# Altium PCB PCB.PcbDoc (part 1 of 3)
Units mil, origin at the board's own origin, x right, y up, seen from the top; angles counter-clockwise.
Board outline 3915 x 3280 mil, 4 copper layers (Top Layer, Top GND, Bottom GND, Bottom Layer), stack 61.581 mil thick; 92 components, 110 nets, 515 pads, 133 vias.
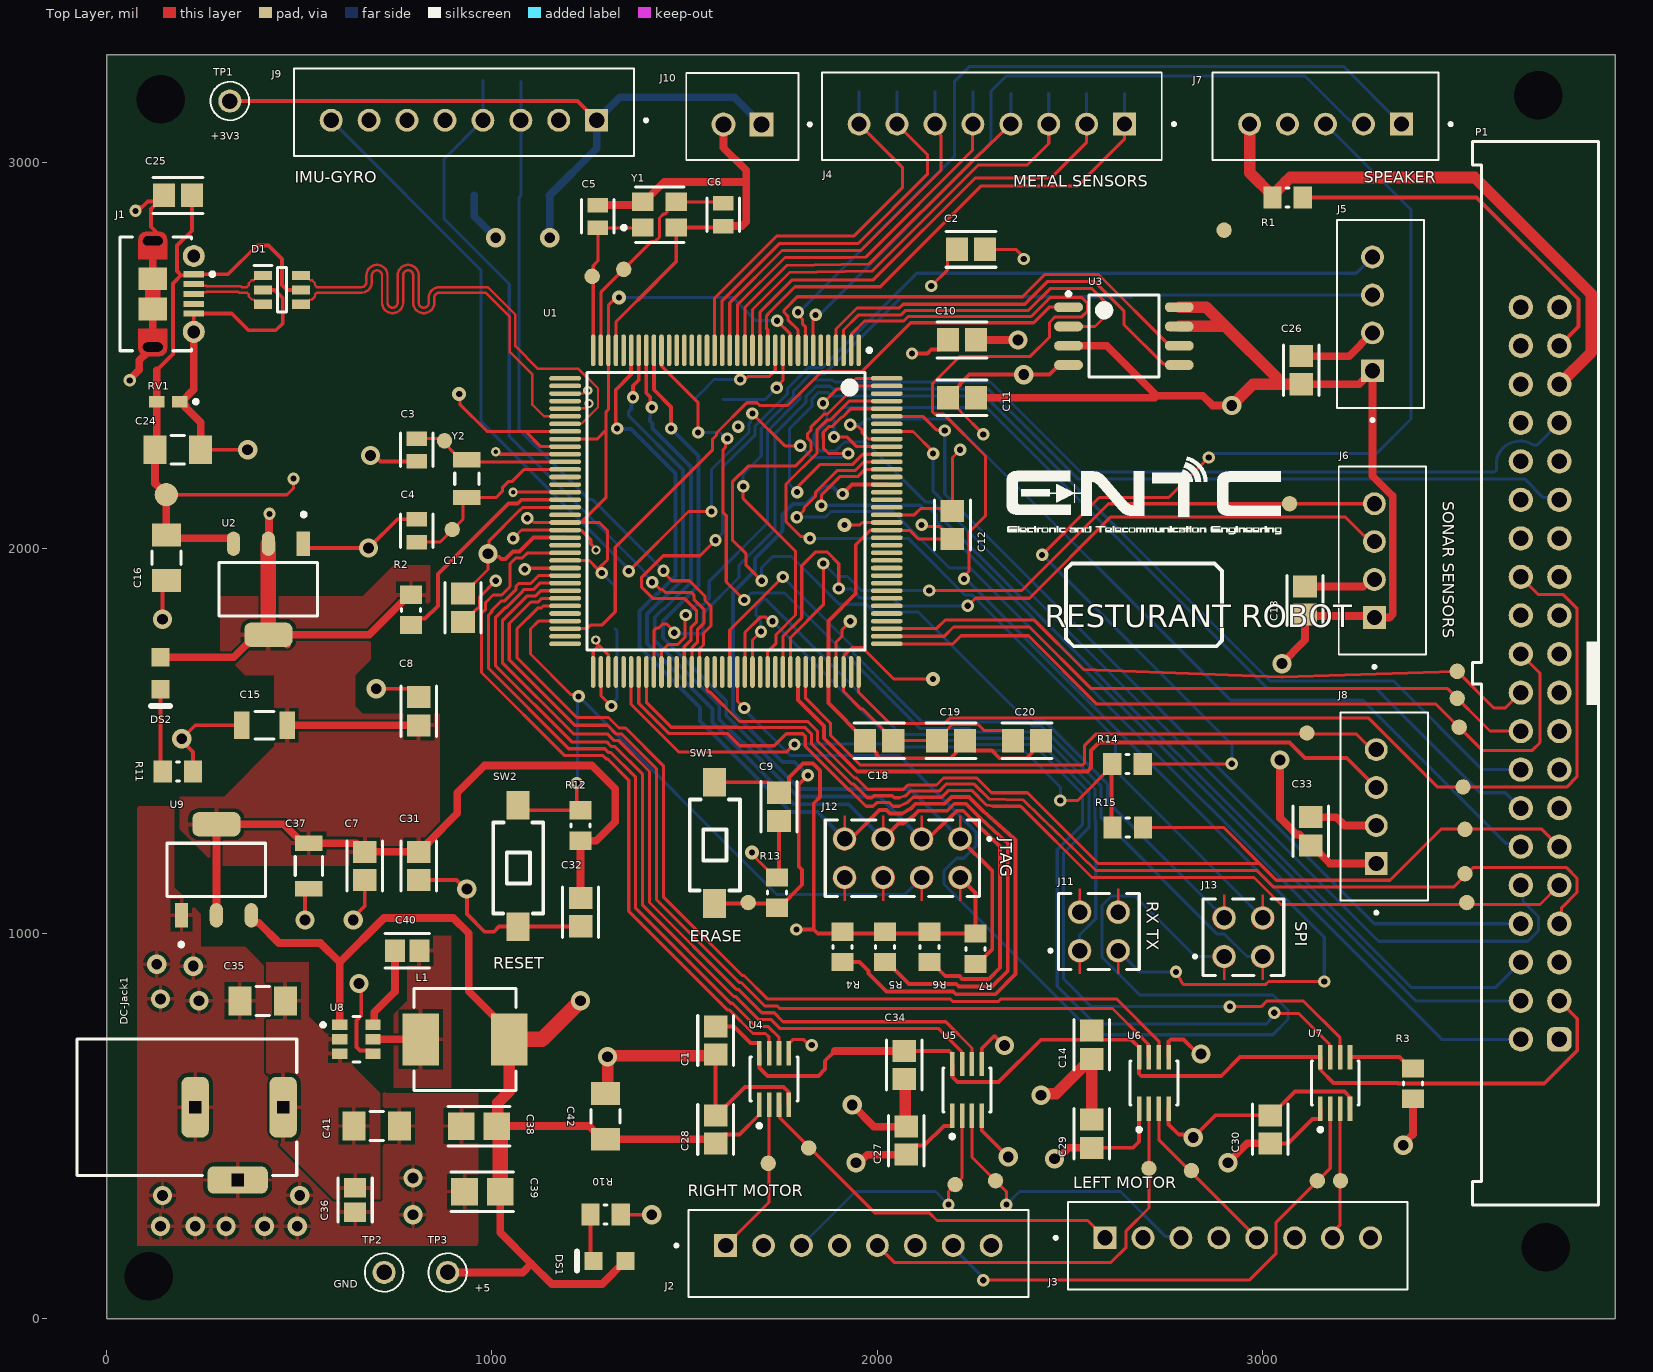
[diagram p0: Top Layer view]
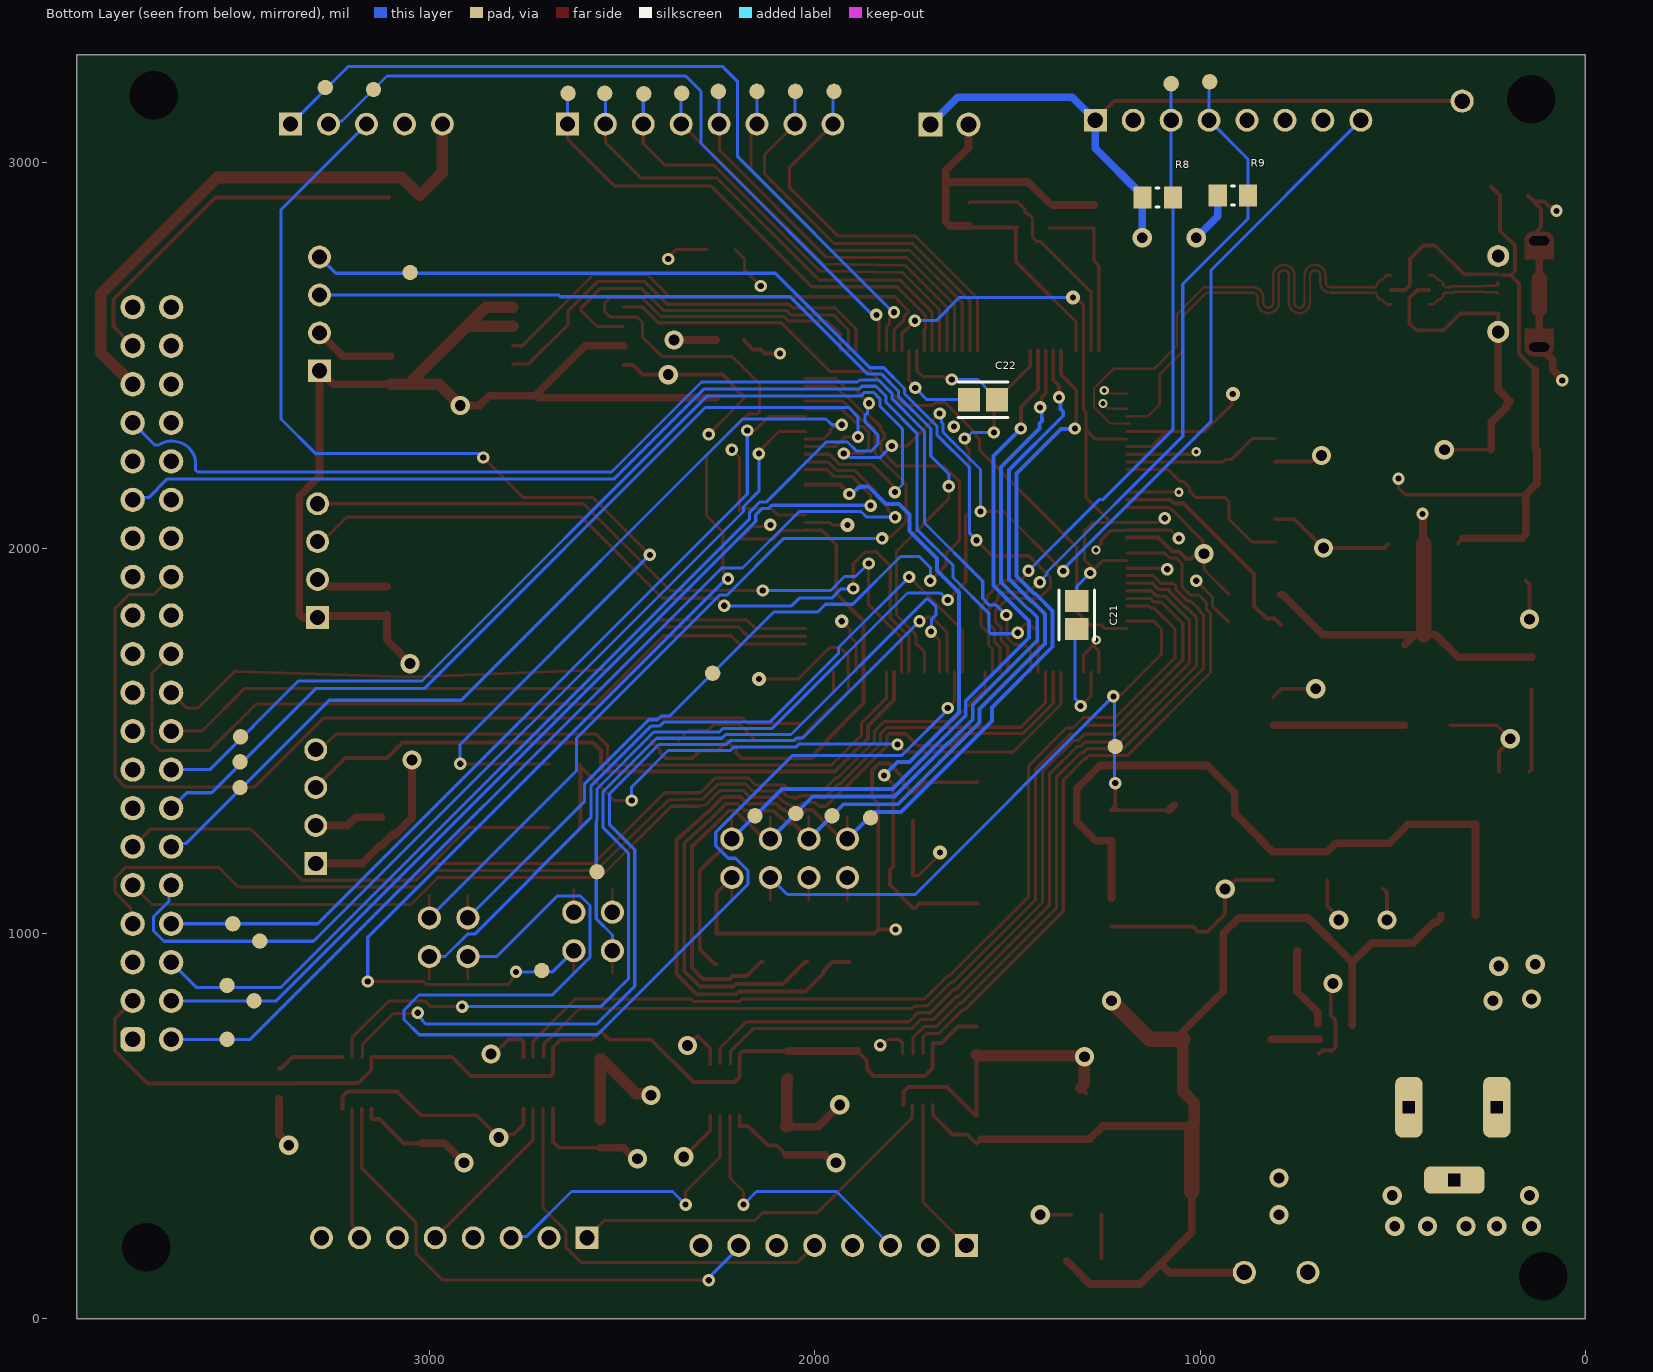
[diagram p1: Bottom Layer view, seen from below]
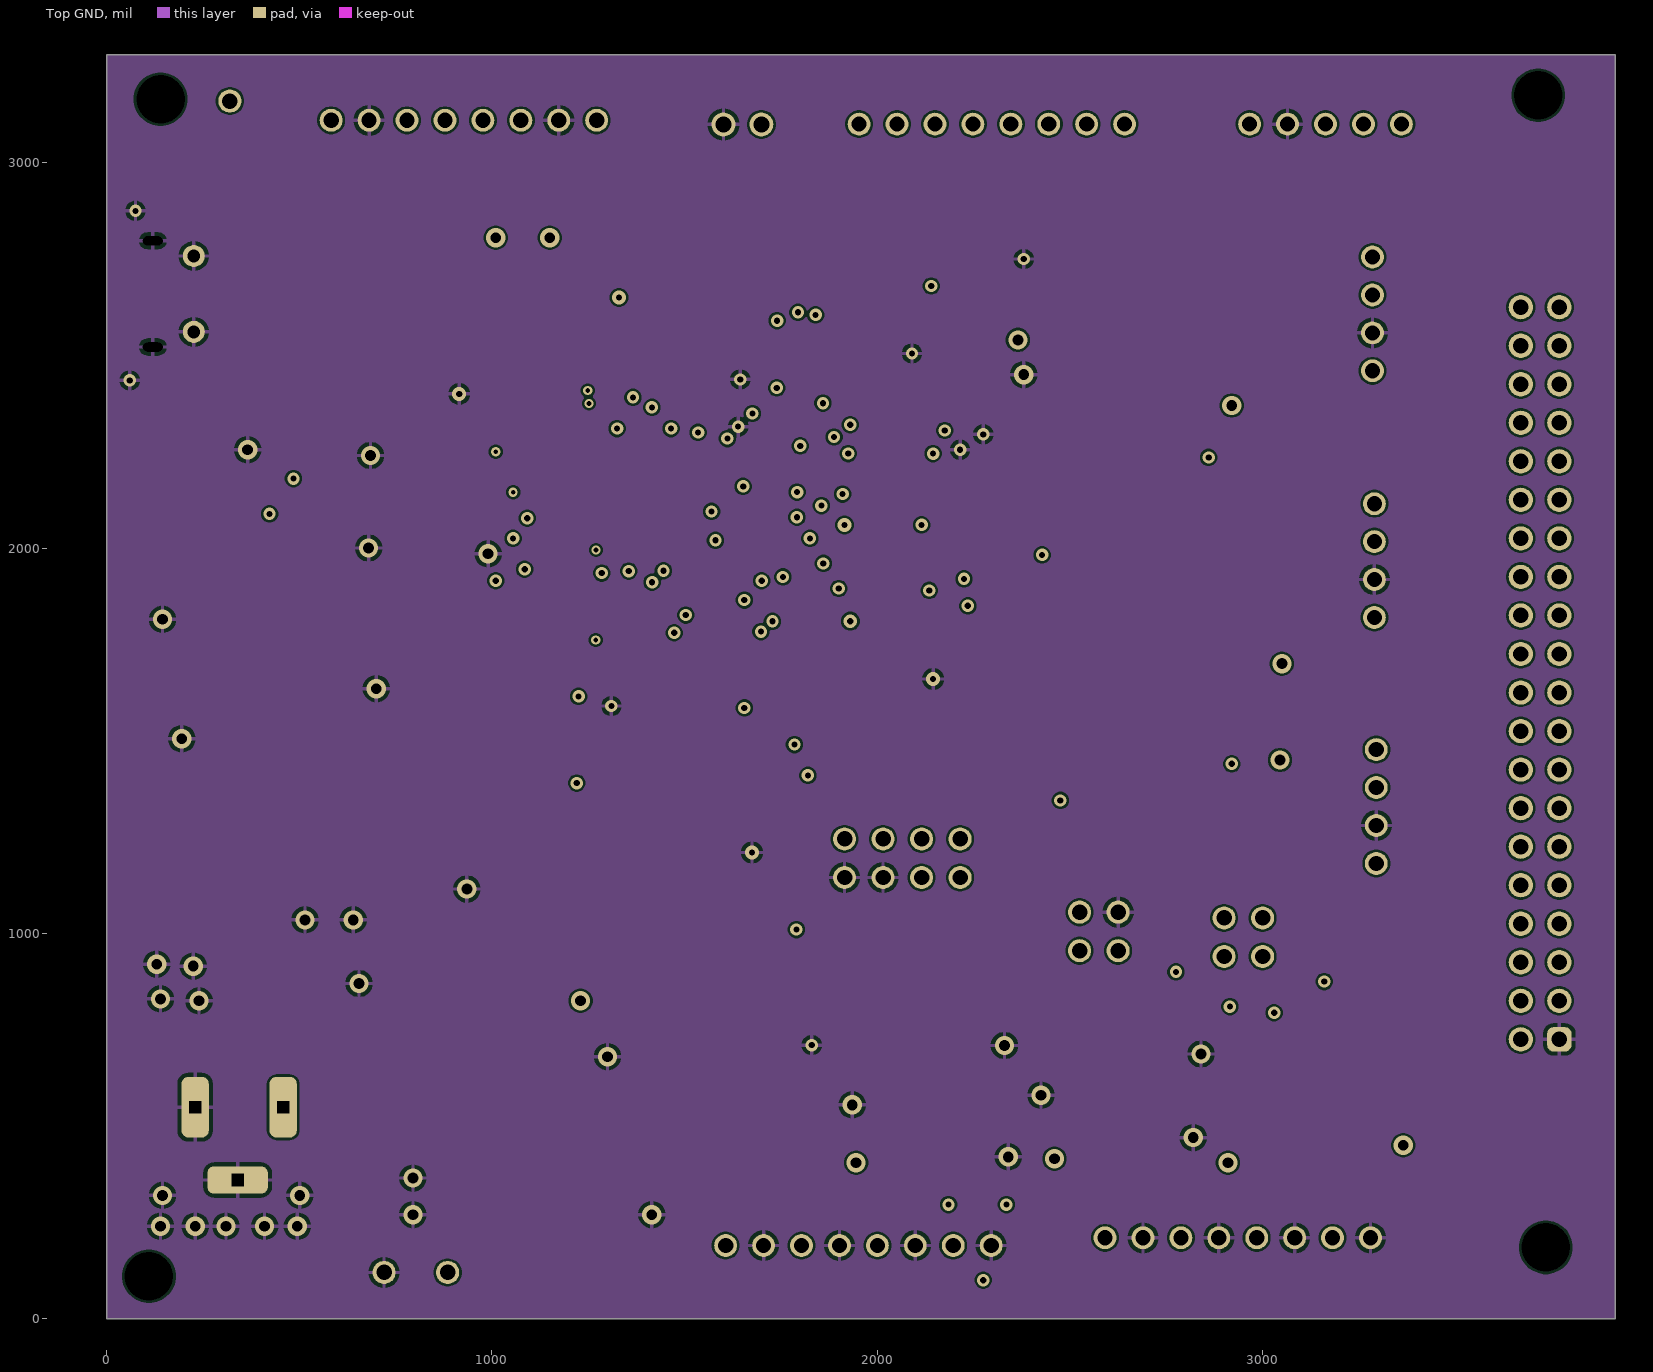
[diagram p2: Top GND]
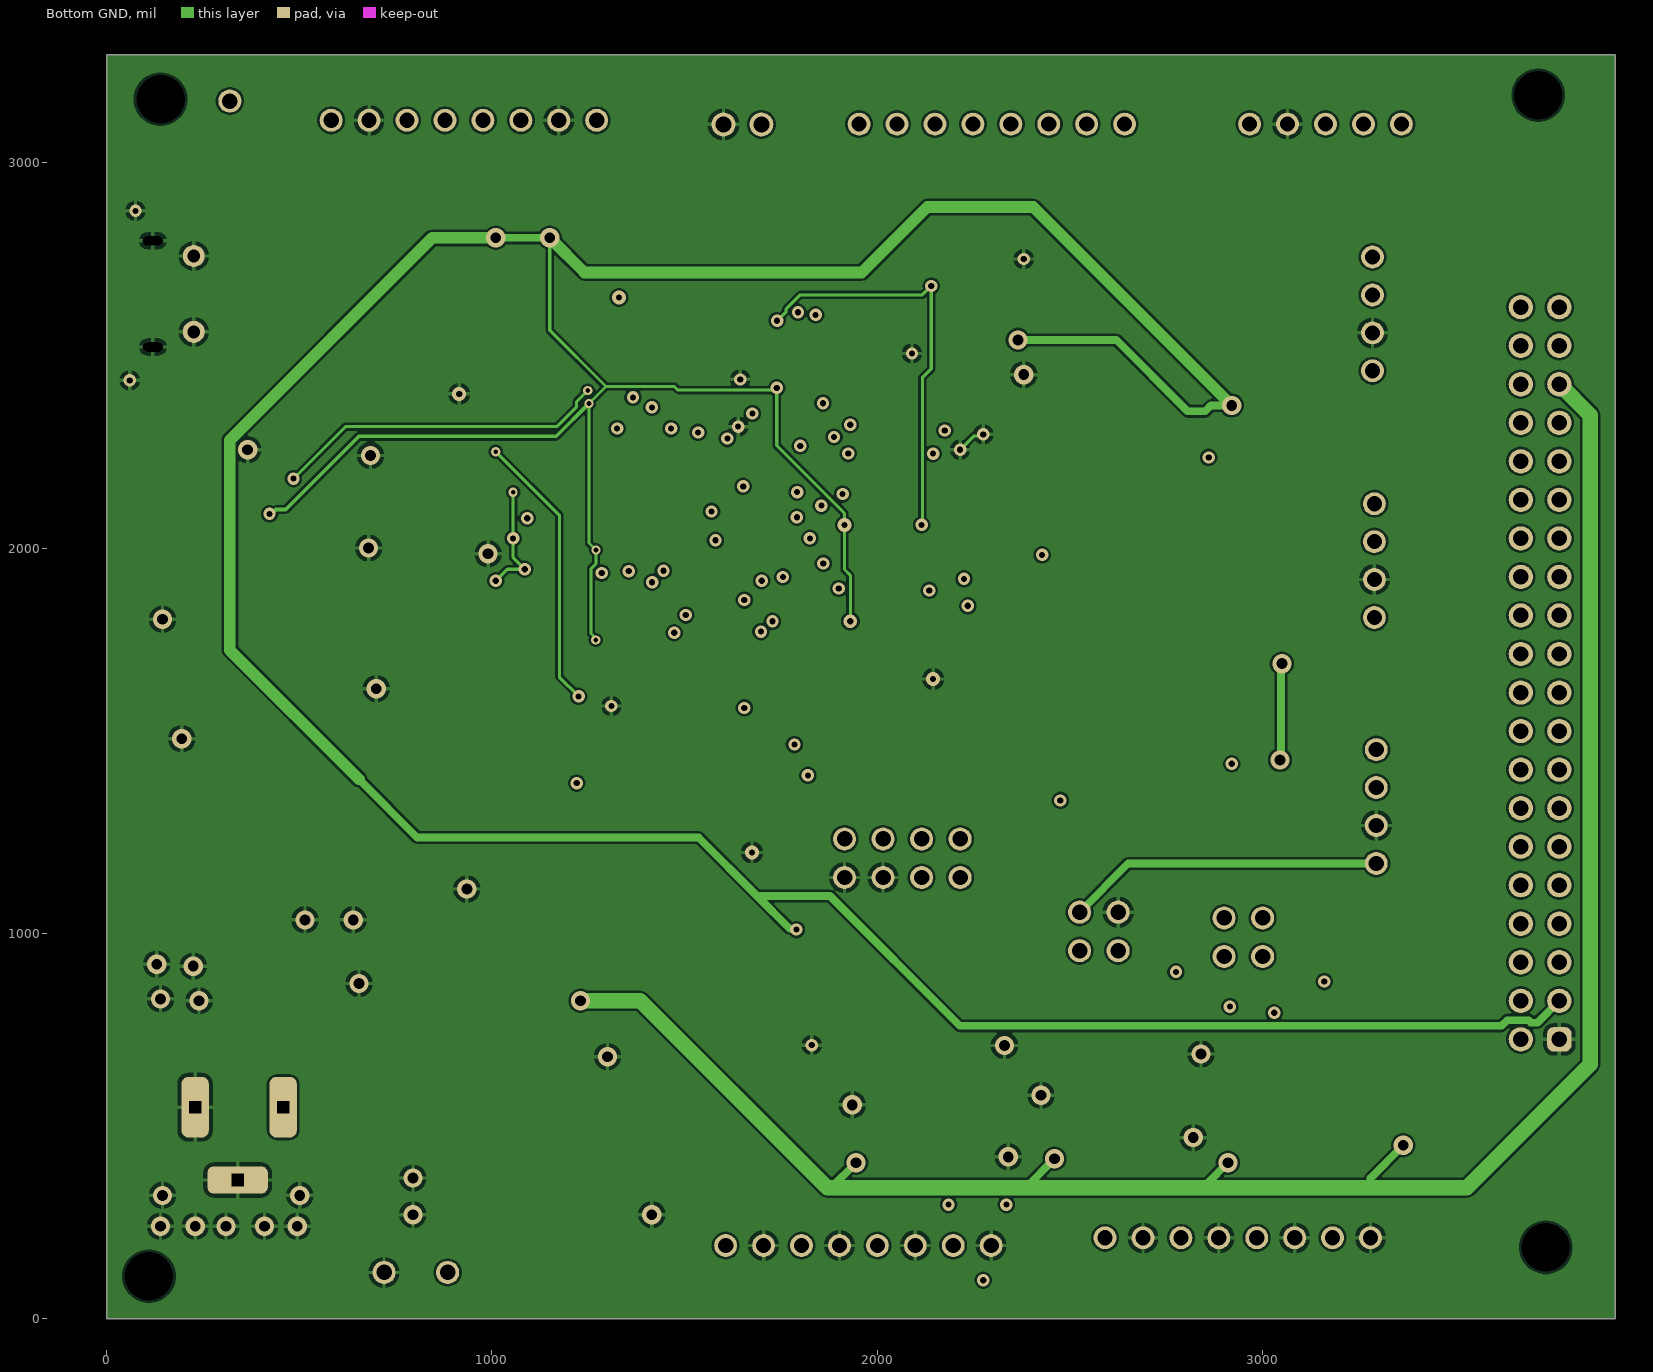
[diagram p3: Bottom GND]
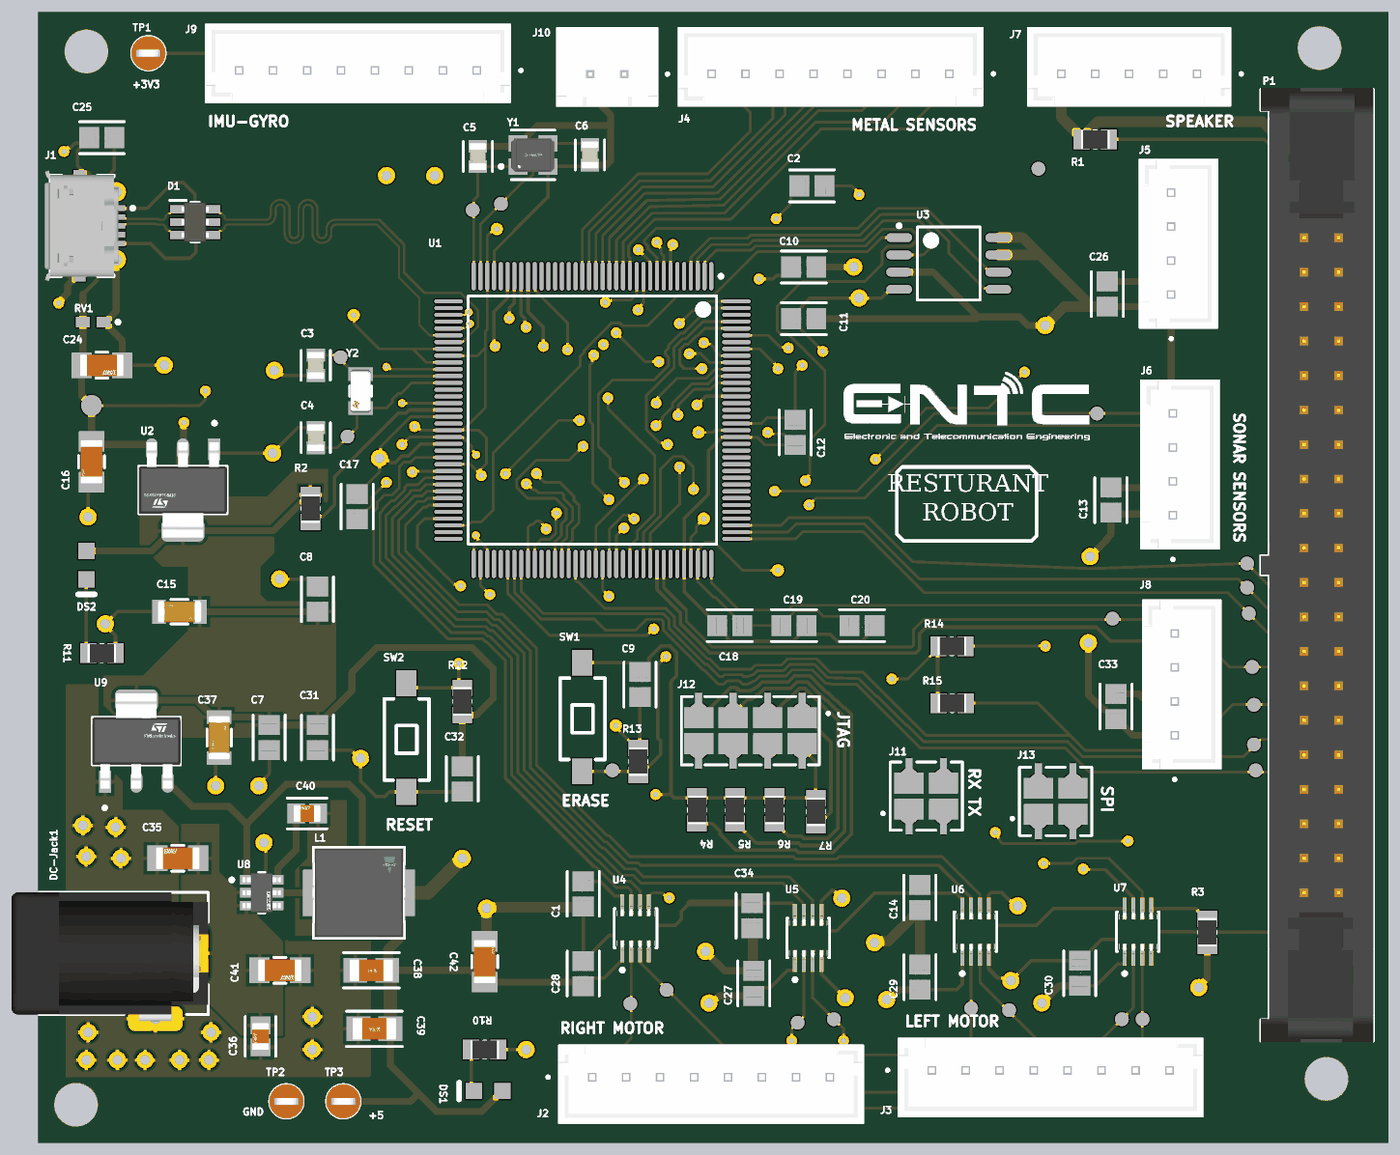
[diagram p5: 3D render of the assembled board from above, using the file's embedded part models]
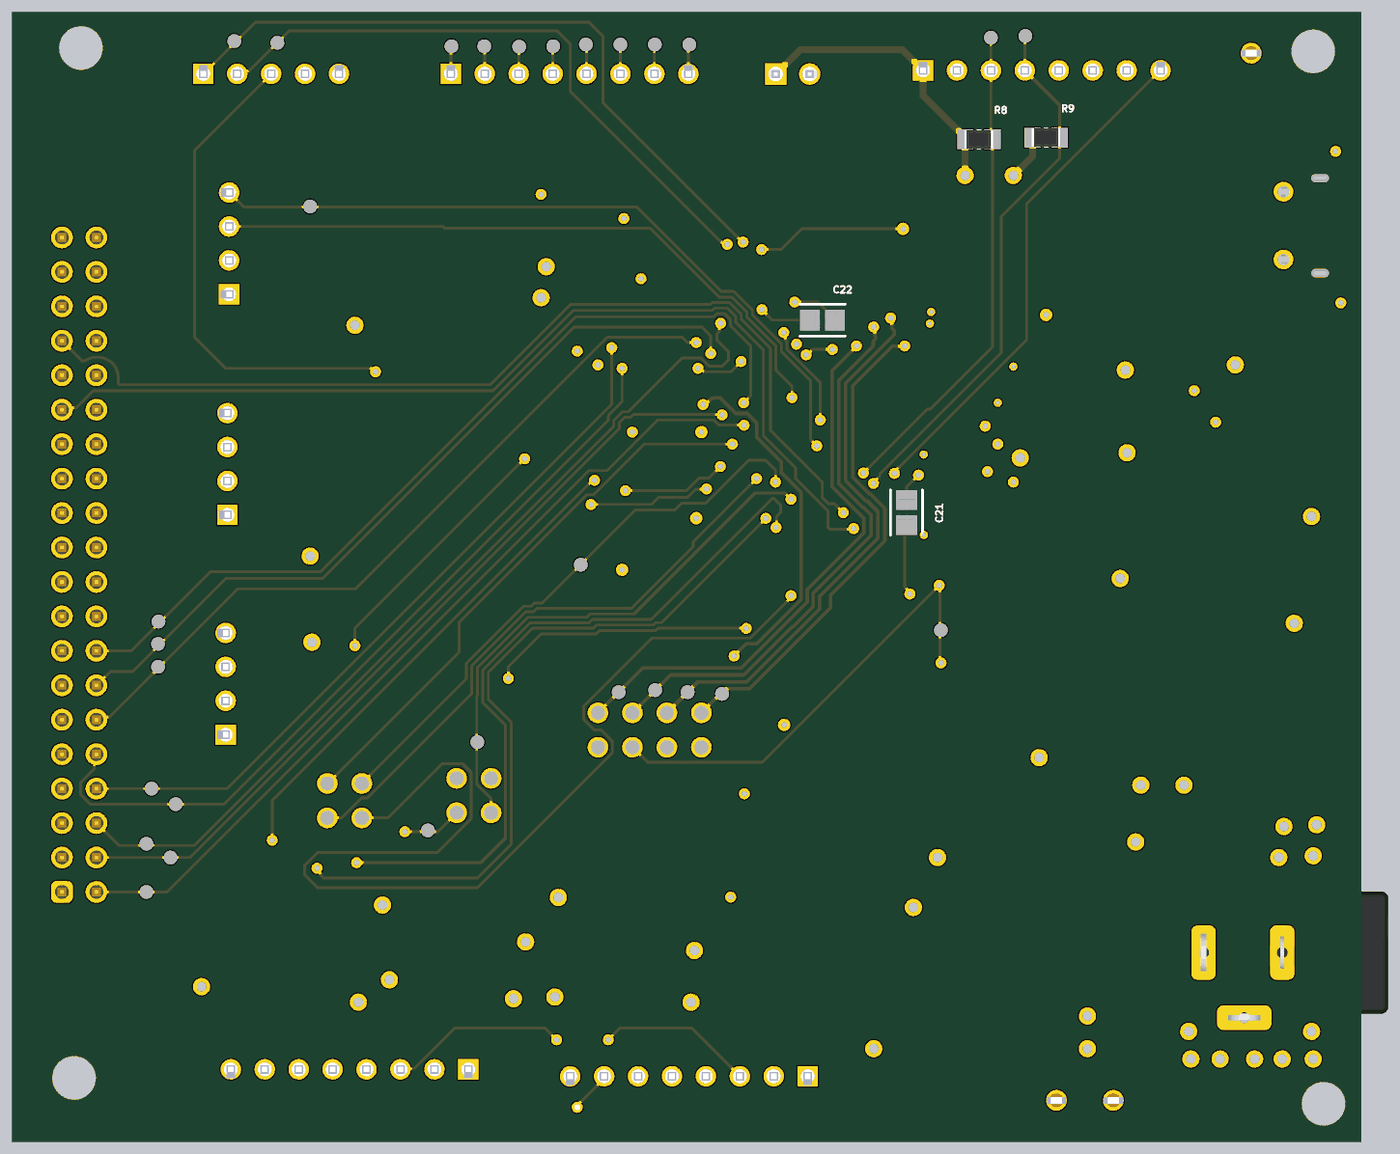
[diagram p6: 3D render of the assembled board from below, using the file's embedded part models]

## Layer stack, top to bottom
Top Solder: solder mask 0.4, Solder Resist, Dk 3.5
Top Layer: signal copper 1.378
Dielectric 2: prepreg 3.913, PP-006, Dk 4.1
Top GND: signal copper 0.598
Dielectric 1: core 49.803, FR-4, Dk 4.8
Bottom GND: signal copper 0.598
Dielectric 3: prepreg 3.913, PP-006, Dk 4.1
Bottom Layer: signal copper 1.378
Bottom Solder: solder mask 0.4, Solder Resist, Dk 3.5

## Board outline
0,0 3915,0 3915,3280 0,3280

## Design rules (kind name [scope] priority, off if disabled: settings)
Clearance Clearance_1 [(ExistsOnLayer('Top GND') Or ExistsOnLayer('Bottom GND')) vs (ExistsOnLayer('Top GND') Or ExistsOnLayer('Bottom GND'))] p1: gap=6 ignorepadtopadclearanceinfootprint=FALSE sourcerule=43 cellrowname=All cellrowtype=0 cellcolname=All cellcoltype=0 innerlayers=TRUE
Clearance Clearance_2 [(ExistsOnLayer('Top Layer') Or ExistsOnLayer('Bottom Layer')) vs (ExistsOnLayer('Top Layer') Or ExistsOnLayer('Bottom Layer'))] p2: gap=6 ignorepadtopadclearanceinfootprint=FALSE sourcerule=43 cellrowname=All cellrowtype=0 cellcolname=All cellcoltype=0 outerlayers=TRUE
Clearance [All] p3: gap=10 ignorepadtopadclearanceinfootprint=FALSE ismatrix=TRUE
DiffPairsRouting DifferentialPairsRouting_1 [InDifferentialPairClass('All Differential Pairs')] p1: maxlimit=10 minlimit=8 mostfreqgap=8 toplayer_minwidth=6.23 toplayer_maxwidth=15 toplayer_prefwidth=6.23 midlayer1_minwidth=6.23 midlayer1_maxwidth=15 midlayer1_prefwidth=6.23 midlayer2_minwidth=6.23 midlayer2_maxwidth=15 midlayer2_prefwidth=6.23 bottomlayer_minwidth=6.23 bottomlayer_maxwidth=15 bottomlayer_prefwidth=6.23 maxuncoupledlength=500
DiffPairsRouting [All] p2: maxlimit=10 minlimit=10 mostfreqgap=10 toplayer_minwidth=15 toplayer_maxwidth=15 toplayer_prefwidth=15 midlayer1_minwidth=15 midlayer1_maxwidth=15 midlayer1_prefwidth=15 midlayer2_minwidth=15 midlayer2_maxwidth=15 midlayer2_prefwidth=15 bottomlayer_minwidth=15 bottomlayer_maxwidth=15 bottomlayer_prefwidth=15 maxuncoupledlength=500
HoleSize [All] p1: absolutevalues=TRUE maxlimit=400 minlimit=1 maxpercent=80.000 minpercent=20.000
PolygonConnect [All] p1: connectstyle=Relief reliefconductorwidth=10 reliefentries=4 polygonreliefangle="90 Angle" airgapwidth=10
RoutingVias [All] p1: holewidth=16 width=32 viastyle="Through Hole" minholewidth=16 minwidth=32 maxholewidth=16 maxwidth=32
SolderMaskExpansion [All] p1: expansion=4 istentingtop=FALSE
SupplyNets "Schematic Supply Nets_5" [InNet('VBUS')] p1: voltage=0.000
SupplyNets "Schematic Supply Nets" [InNet('+VDDOUT')] p2: voltage=0.000
SupplyNets "Schematic Supply Nets_2" [InNet('+3V3')] p3: voltage=0.000
SupplyNets "Schematic Supply Nets_1" [InNet('+12')] p4: voltage=0.000
SupplyNets "Schematic Supply Nets_4" [InNet('+5')] p5: voltage=0.000
SupplyNets "Schematic Supply Nets_3" [InNet('GND')] p6: voltage=0.000
Width [All] p1 off: maxlimit=10 minlimit=10 preferedwidth=10
28 further rules are at their usual default settings.

## Classes and differential pairs
component class BUTTONS: R12 R13 SW1 SW2
component class USB: C15 C16 C24 C25 C26 D1 J1 RV1 U2 U3
component class SAM3X_MCU2: C1 C2 C3 C4 C5 C6 C7 C8 C9 C10 C12 C13 C14 C17 C18 C19 C20 C21 C22 R2 Y1 Y2
component class SAM3X-MCU: R1 R14 R15 TP1 TP2 U1
component class POWER: C35 C36 C37 C38 C39 C40 C41 C42 DC-Jack1 DS1 DS2 L1 R10 R11 U8 U9
component class MOTOR_DVR: C27 C28 C29 C30 C31 C32 C33 C34 J2 J3 R3 U4 U5 U6 U7
component class CONNECTORS: J4 J5 J6 J7 J8 J9 J10 J11 J12 J13 P1 R4 R5 R6 R7 R8 R9
differential pair D_XUSB: +XUSB_P -XUSB_N
differential pair D_USB: +USB_P -USB_N

## Components (designator, comment, footprint, x,y, rotation, side; value= is the part's Value field where it differs from the comment)
C1 "CL21B104KOANNNC" FP-CL21-IPC_A 1580.46,721.64 r270 top
C2 "CL21B104KOANNNC" FP-CL21-IPC_A 2243.55,2775 r0 top
C3 "C0805C120J5GACTU" FP-C0805C-DN-MFG 805,2254.53 r270 top locked value="12 pF"
C4 "C0805C120J5GACTU" FP-C0805C-DN-MFG 805,2045 r90 top locked value="12 pF"
C5 "C0805C120J5GACTU" FP-C0805C-DN-MFG 1275,2860.47 r90 top value="12 pF"
C6 "C0805C120J5GACTU" FP-C0805C-DN-MFG 1600,2865 r270 top locked value="12 pF"
C7 "CL21A225KOFNNNG" FP-CL21-IPC_A 670,1175 r270 top
C8 "CL21B104KOANNNC" FP-CL21-IPC_A 810,1576.45 r90 top
C9 "CL21B104KOANNNC" FP-CL21-IPC_A 1745,1328.55 r270 top locked
C10 "CL21B104KOANNNC" FP-CL21-IPC_A 2220,2540 r180 top locked
C11 "CL21B104KOANNNC" FP-CL21-IPC_A 2220,2390 r180 top locked
C12 "CL21A225KOFNNNG" FP-CL21-IPC_A 2195,2060 r90 top locked
C13 "CL21B104KOANNNC" FP-CL21-IPC_A 3110,1863.55 r90 top
C14 "CL21B104KOANNNC" FP-CL21-IPC_A 2556.67,710.97 r270 top locked
C15 "CC1206KKX7R9BB475" FP-CC1206-1_25-MFG 410,1540 r180 top value="4.7 uF"
C16 "12065C105KAT2A" FP-1206-L_3_2_0_2-W_1_6_0-IPC_A 155,1975 r270 top locked
C17 "CL21B104KOANNNC" FP-CL21-IPC_A 925,1845 r90 top
C18 "CL21B104KOANNNC" FP-CL21-IPC_A 2005,1500 r0 top
C19 "CL21B104KOANNNC" FP-CL21-IPC_A 2191.45,1500 r180 top
C20 "CL21B104KOANNNC" FP-CL21-IPC_A 2388.55,1500 r180 top locked
C21 "CL21B104KOANNNC" FP-CL21-IPC_A 1320,1826.45 r270 bottom locked
C22 "CL21B104KOANNNC" FP-CL21-IPC_A 1563.55,2385 r180 bottom locked
C24 "1206ZD106KAT2A" FP-1206-L_3_2_0_2-W_1_6_0-IPC_A 185,2255 r0 top locked
C25 "CL21B104KOANNNC" FP-CL21-IPC_A 185,2915 r180 top locked
C26 "CL21B104KOANNNC" FP-CL21-IPC_A 3100,2461.45 r90 top locked
C27 "CL21B104KOANNNC" FP-CL21-IPC_A 2075,462.06 r90 top
C28 "CL21B104KOANNNC" FP-CL21-IPC_A 1580.46,490.66 r90 top
C29 "CL21B104KOANNNC" FP-CL21-IPC_A 2556.67,480 r90 top locked
C30 "CL21B104KOANNNC" FP-CL21-IPC_A 3020,491.45 r90 top locked
C31 "CL21B104KOANNNC" FP-CL21-IPC_A 810,1175 r270 top
C32 "CL21B104KOANNNC" FP-CL21-IPC_A 1230,1055 r270 top locked
C33 "CL21B104KOANNNC" FP-CL21-IPC_A 3125,1265 r90 top locked
C34 "CL21B104KOANNNC" FP-CL21-IPC_A 2070,658.51 r270 top
C35 "1206ZD106KAT2A" FP-1206-L_3_2_0_2-W_1_6_0-IPC_A 405,825 r180 top
C36 "100nF" FP-0805-L_2_01_0_2-W_1_25-IPC_B 645,308.28 r270 top locked
C37 "CC1206KKX7R9BB475" FP-CC1206-1_25-MFG 525,1175 r270 top value="4.7 uF"
C38 "C3216X5R1E226M160AB" FP-C3216-160-0_2-IPC_B 966.3,500 r180 top
C39 "C3216X5R1E226M160AB" FP-C3216-160-0_2-IPC_B 975,330 r180 top
C40 "100nF" FP-0805-L_2_01_0_2-W_1_25-IPC_B 780,955 r180 top
C41 "1206ZD106KAT2A" FP-1206-L_3_2_0_2-W_1_6_0-IPC_A 700.91,500 r0 top
C42 "12065C105KAT2A" FP-1206-L_3_2_0_2-W_1_6_0-IPC_A 1295,525 r90 top
D1 "USBLC6-2SC6Y" SOT95P280X145-6N 455,2670 r0 top locked
DC-Jack1 "694106301002" 694106301002 208.11,548.98 r270 top
DS1 "HSMG-C170" AVAG-HSMX-C170_V 1305,150 r180 top
DS2 "HSMG-C170" AVAG-HSMX-C170_V 140,1675 r270 top locked
J1 "105017-0001" USB-MICRO-B_V 173.15,2659.37 r270 top locked
J2 "B8B-XH-A(LF)(SN)" JST_B8B-XH-A(LF)(SN) 1951.06,169.33 r180 top locked
J3 "B8B-XH-A(LF)(SN)" JST_B8B-XH-A(LF)(SN) 2935.51,189.33 r180 top locked
J4 "B8B-XH-A(LF)(SN)" JST_B8B-XH-A(LF)(SN) 2297.36,3120.67 r0 top locked
J5 "SONAR1" JST_B4B-XH-A(LF)(SN) 3305.67,2607.64 r270 top locked
J6 "SONAR2" JST_B4B-XH-A(LF)(SN) 3310.67,1967.36 r270 top locked
J7 "SPEAKER" JST_B5B-XH-A(LF)(SN) 3163.15,3120.67 r0 top locked
J8 "SONAR3" JST_B4B-XH-A(LF)(SN) 3315.67,1329.21 r270 top locked
J9 "B8B-XH-A(LF)(SN)" JST_B8B-XH-A(LF)(SN) 927.36,3130.67 r0 top locked
J10 "B2B-XH-A(LF)(SN)" JST_B2B-XH-A(LF)(SN) 1650,3120 r0 top locked
J11 "RX TX" SAMTEC_MTLW-102-XX-X-D-XXX 2575,1005 r0 top locked
J12 "JTAG" SAMTEC_MTLW-104-06-G-D-160 2065,1195 r180 top locked
J13 "SPI" SAMTEC_MTLW-102-XX-X-D-XXX 2950,990 r0 top locked value="SPI BUS"
L1 "IHLP2525BDER4R7M01" FP-IHLP-2525BD-FP_2_413x3-MFG 930,725 r0 top
P1 "61204022021" 61204022021 3720,1675 r90 top locked
R1 "RC0805JR-0710KL" RESC2013X60X35ML10T20 3065,2910 r180 top
R2 "RC0805JR-0710KL" RESC2013X60X35ML10T20 790,1839.37 r90 top locked
R3 "RC0805JR-0710KL" RESC2013X60X35ML10T20 3390,610 r90 top locked
R4 "RC0805JR-0710KL" RESC2013X60X35ML10T20 1910,965 r90 top locked
R5 "RC0805JR-0710KL" RESC2013X60X35ML10T20 2020.4,965 r90 top locked
R6 "RC0805JR-0710KL" RESC2013X60X35ML10T20 2135,965 r90 top locked
R7 "RC0805JR-0710KL" RESC2013X60X35ML10T20 2255,960 r90 top locked
R8 "RC0805JR-0710KL" RESC2013X60X35ML10T20 1110,2910 r0 bottom locked
R9 "RC0805JR-0710KL" RESC2013X60X35ML10T20 915,2915 r0 bottom locked
R10 "RC0805JR-0710KL" RESC2013X60X35ML10T20 1295,270 r0 top
R11 "RC0805JR-0710KL" RESC2013X60X35ML10T20 185,1420 r0 top
R12 "RC0805JR-0710KL" RESC2013X60X35ML10T20 1230,1280 r270 top
R13 "RC0805JR-0710KL" RESC2013X60X35ML10T20 1740,1105.63 r270 top locked
R14 "RC0805JR-0710KL" RESC2013X60X35ML10T20 2649.37,1440 r180 top locked
R15 "RC0805JR-0710KL" RESC2013X60X35ML10T20 2650,1275 r180 top locked
RV1 "CG0603MLC-05E" BOUR-CG0603-2_V 159.92,2380 r180 top locked
SW1 "SWITCH" PCBComponent_1 1580,1230 r90 top locked
SW2 "SWITCH" PCBComponent_1 1070,1170 r90 top
TP1 "5000" KEYSTONE_5000 320,3160 r0 top (schematic designator TP3)
TP2 "5000" KEYSTONE_5000 720,120 r0 top
TP3 "5000" KEYSTONE_5000 885,120 r0 top (schematic designator TP4)
U1 "ATSAM3X8EA-AU" LQFP144_M 1607.32,2095.79 r270 top locked
U2 "LDL1117S33R" FP-SOT223-0046067-IPC_C 420,1893.11 r270 top locked
U3 "W25Q128FVSIG" WINB-SOIC-8_M 2640,2550 r0 top
U4 "SN74LVC2T45DCTR" FP-DCT0008A-MFG 1732.2,621.93 r90 top
U5 "SN74LVC2T45DCTR" FP-DCT0008A-MFG 2232.8,593.99 r90 top
U6 "SN74LVC2T45DCTR" FP-DCT0008A-MFG 2717.8,611.93 r90 top locked
U7 "SN74LVC2T45DCTR" FP-DCT0008A-MFG 3188.39,611.93 r90 top locked
U8 "AP63205WU-7" FP-TSOT26-MFG 648.29,725 r0 top
U9 "LDL1117S33R" FP-SOT223-0046067-IPC_C 285,1165 r90 top
Y1 "12MHZ" FP-ABM8G-MFG 1435,2865 r0 top locked
Y2 "32.768KHZ" FP-NX3215SA-MFG 935,2180 r270 top locked

## Footprints (in the part's own frame and the unit in brackets; to place one, negate y for a bottom-side part, rotate by r counter-clockwise, add the part's x,y. Pads: shape width x height; smd on the part's side, far side on the other; paste and mask are expansions set on the pad)
61204022021 [mm] "40 pins, straight, short lever, gold plating"
  rrect50% 1.6x1.6 hole 1.02: 1(-24.13,-1.27)
  round 1.6 hole 1.02: 2(-24.13,1.27) 3(-21.59,-1.27) 4(-21.59,1.27) 5(-19.05,-1.27) 6(-19.05,1.27) 7(-16.51,-1.27) 8(-16.51,1.27) 9(-13.97,-1.27) 10(-13.97,1.27) 11(-11.43,-1.27) 12(-11.43,1.27) 13(-8.89,-1.27) 14(-8.89,1.27) 15(-6.35,-1.27) 16(-6.35,1.27) 17(-3.81,-1.27) 18(-3.81,1.27) 19(-1.27,-1.27) 20(-1.27,1.27) 21(1.27,-1.27) 22(1.27,1.27) 23(3.81,-1.27) 24(3.81,1.27) 25(6.35,-1.27) 26(6.35,1.27) 27(8.89,-1.27) 28(8.89,1.27) 29(11.43,-1.27) 30(11.43,1.27) 31(13.97,-1.27) 32(13.97,1.27) 33(16.51,-1.27) 34(16.51,1.27) 35(19.05,-1.27) 36(19.05,1.27) 37(21.59,-1.27) 38(21.59,1.27) 39(24.13,-1.27) 40(24.13,1.27)
  silkscreen extent -35.05,-3.85 35.05,4.45, body extent -35.15,-3.85 35.15,4.45, height 24.55
694106301002 [mm] "DC Power Jack Right Angled(6.4)"
  rrect50% 4x1.8 hole 0.8 square: 1(0,6.35) 2(0,0.55)
  rrect50% 1.8x4 hole 0.8 square: 3(4.8,3.35)
  silkscreen extent -4.5,-7.25 4.5,7.25, body extent -4.5,-7.25 5,7.25, height 10.75
AVAG-HSMX-C170_V [mm] "SMD, 2-Leads, Body 2x1.25mm, Height 0.8mm"
  rect 1.2x1.2 smd: 1(-1.05,0) 2(1.05,0)
  silkscreen extent 2.15,-0.63 2.15,0.63, body extent -1,-0.63 1,0.63, height 0.8
BOUR-CG0603-2_V [mm] "SMD, 2-Leads, Body 1.6x0.8mm, Pitch 1.52mm"
  rect 1.02x0.76 smd: 1(-0.76,0) 2(0.76,0)
  silkscreen extent -1.94,-0.12 -1.7,0.12, body extent -0.8,-0.4 0.8,0.4, height 0.55
FP-0805-L_2_01_0_2-W_1_25-IPC_B [mil]
  rect 51.36x57.33 smd paste+0 mask+0: 1(-31.72,0) 2(31.72,0)
  silkscreen extent -57,-44 57,44, body extent -67,-39 67,39, height 10
FP-1206-L_3_2_0_2-W_1_6_0-IPC_A [mil]
  rect 59.24x75.05 smd paste+0 mask+0: 1(-59.09,0) 2(59.09,0)
  silkscreen extent -18,-38 18,38, body extent -108,-57 108,57, height 10
FP-ABM8G-MFG [mm]
  rect 1.4x1.2 smd paste+0 mask+0: 1(-1.1,-0.85) 2(1.1,-0.85) 3(1.1,0.85) 4(-1.1,0.85)
  silkscreen extent -2.47,-1.83 1.6,1.83, body extent -1.9,-1.55 1.9,1.55, height 0.25
FP-C0805C-DN-MFG [mm]
  rect 0.95x1.35 smd paste+0 mask+0: 1(-0.75,0) 2(0.75,0)
  silkscreen extent -1.1,-1.07 1.1,1.07, body extent -1.4,-0.85 1.4,0.85, height 0.25
FP-C3216-160-0_2-IPC_B [mil]
  rect 69.05x71.11 smd paste+0 mask+0: 1(-46.3,0) 2(46.3,0)
  silkscreen extent -81,-51 81,51, body extent -91,-45 91,45, height 10
FP-CC1206-1_25-MFG [mm]
  rect 1x1.8 smd paste+0 mask+0: 1(-1.5,0) 2(1.5,0)
  silkscreen extent -0.63,-0.9 0.63,0.9, body extent -2.2,-1.25 2.2,1.25, height 0.25
FP-CL21-IPC_A [mil]
  rect 57.27x61.27 smd paste+0 mask+0: 1(-36.45,0) 2(36.45,0)
  silkscreen extent -65,-46 65,46, body extent -85,-50 85,50, height 10
FP-DCT0008A-MFG [mm]
  rect 1.6x0.3 smd paste-1000 mask+0: 1(-1.7,0.975) 2(-1.7,0.325) 3(-1.7,-0.325) 4(-1.7,-0.975) 5(1.7,-0.975) 6(1.7,-0.325) 7(1.7,0.325) 8(1.7,0.975)
  silkscreen extent -3.2,-1.58 1.45,1.58, body extent -2.6,-1.68 2.6,1.68, height 0.25
FP-IHLP-2525BD-FP_2_413x3-MFG [mil]
  rect 95x135 smd paste+0 mask+0: 1(-115,0) 2(115,0)
  silkscreen extent -132,-132 132,132, body extent -166,-136 166,136, height 10
FP-NX3215SA-MFG [mm]
  rect 1x1.8 smd paste+0 mask+0: 1(-1.25,0) 2(1.25,0)
  silkscreen extent -0.38,-0.8 0.38,0.8, body extent -1.85,-1 1.85,1, height 0.25
FP-SOT223-0046067-IPC_C [mm]
  rect 1.604x0.88 smd paste+0 mask+0: 1(-3,2.3)
  rrect100% 1.604x0.88 smd paste+0 mask+0: 2(-3,0) 3(-3,-2.3)
  rrect55% 1.604x3.18 smd paste+0 mask+0: 4(3,0)
  silkscreen extent -5.05,-3.25 1.75,3.25, body extent -3.9,-3.35 3.9,3.35, height 0.25
FP-TSOT26-MFG [mm]
  rect 1x0.7 smd paste+0 mask+0: 1(-1.099,0.95) 2(-1.099,0) 3(-1.099,-0.95) 4(1.099,-0.95) 5(1.099,0) 6(1.099,0.95)
  silkscreen extent -2.32,-1.5 0.22,1.5, body extent -1.7,-1.6 1.7,1.6, height 0.25
JST_B2B-XH-A(LF)(SN) [mm]
  rect 1.575x1.575 / inner round 1.575 / far side rect 1.575x1.575 hole 1.05: 1(1.25,-0.525)
  round 1.575 hole 1.05: 2(-1.25,-0.525)
  silkscreen extent -3.7,-2.88 4.54,2.88, body extent -3.7,-2.88 3.7,2.88, height 7
JST_B4B-XH-A(LF)(SN) [mm]
  rect 1.508x1.508 / inner round 1.508 / far side rect 1.508x1.508 hole 1: 1(3.75,-0.525)
  round 1.508 hole 1: 2(1.25,-0.525) 3(-1.25,-0.525) 4(-3.75,-0.525)
  silkscreen extent -6.2,-2.88 7.1,2.88, body extent -6.2,-2.88 6.2,2.88, height 7
JST_B5B-XH-A(LF)(SN) [mm]
  rect 1.508x1.508 / inner round 1.508 / far side rect 1.508x1.508 hole 1: 1(5,-0.525)
  round 1.508 hole 1: 2(2.5,-0.525) 3(0,-0.525) 4(-2.5,-0.525) 5(-5,-0.525)
  silkscreen extent -7.45,-2.88 8.35,2.88, body extent -7.45,-2.88 7.45,2.88, height 7
JST_B8B-XH-A(LF)(SN) [mm]
  rect 1.508x1.508 / inner round 1.508 / far side rect 1.508x1.508 hole 1: 1(8.75,-0.525)
  round 1.508 hole 1: 2(6.25,-0.525) 3(3.75,-0.525) 4(1.25,-0.525) 5(-1.25,-0.525) 6(-3.75,-0.525) 7(-6.25,-0.525) 8(-8.75,-0.525)
  silkscreen extent -11.2,-2.88 12.1,2.88, body extent -11.2,-2.88 11.2,2.88, height 7
KEYSTONE_5000 [mm]
  round 1.53 hole 1.02: TP(0,0)
  silkscreen extent -1.27,-1.27 1.27,1.27, body extent -1.27,-1.27 1.27,1.27, height 4.57
LQFP144_M [mm] "Thin QFP, 144-Leads, Body 20x20mm, Pitch 0.5mm, IPC Low Density"
  oval 2.1x0.3 smd: 1(-10.6,8.75) 2(-10.6,8.25) 3(-10.6,7.75) 4(-10.6,7.25) 5(-10.6,6.75) 6(-10.6,6.25) 7(-10.6,5.75) 8(-10.6,5.25) 9(-10.6,4.75) 10(-10.6,4.25) 11(-10.6,3.75) 12(-10.6,3.25) 13(-10.6,2.75) 14(-10.6,2.25) 15(-10.6,1.75) 16(-10.6,1.25) 17(-10.6,0.75) 18(-10.6,0.25) 19(-10.6,-0.25) 20(-10.6,-0.75) 21(-10.6,-1.25) 22(-10.6,-1.75) 23(-10.6,-2.25) 24(-10.6,-2.75) 25(-10.6,-3.25) 26(-10.6,-3.75) 27(-10.6,-4.25) 28(-10.6,-4.75) 29(-10.6,-5.25) 30(-10.6,-5.75) 31(-10.6,-6.25) 32(-10.6,-6.75) 33(-10.6,-7.25) 34(-10.6,-7.75) 35(-10.6,-8.25) 36(-10.6,-8.75) 73(10.6,-8.75) 74(10.6,-8.25) 75(10.6,-7.75) 76(10.6,-7.25) 77(10.6,-6.75) 78(10.6,-6.25) 79(10.6,-5.75) 80(10.6,-5.25) 81(10.6,-4.75) 82(10.6,-4.25) 83(10.6,-3.75) 84(10.6,-3.25) 85(10.6,-2.75) 86(10.6,-2.25) 87(10.6,-1.75) 88(10.6,-1.25) 89(10.6,-0.75) 90(10.6,-0.25) 91(10.6,0.25) 92(10.6,0.75) 93(10.6,1.25) 94(10.6,1.75) 95(10.6,2.25) 96(10.6,2.75) 97(10.6,3.25) 98(10.6,3.75) 99(10.6,4.25) 100(10.6,4.75) 101(10.6,5.25) 102(10.6,5.75) 103(10.6,6.25) 104(10.6,6.75) 105(10.6,7.25) 106(10.6,7.75) 107(10.6,8.25) 108(10.6,8.75)
  oval 0.3x2.1 smd: 37(-8.75,-10.6) 38(-8.25,-10.6) 39(-7.75,-10.6) 40(-7.25,-10.6) 41(-6.75,-10.6) 42(-6.25,-10.6) 43(-5.75,-10.6) 44(-5.25,-10.6) 45(-4.75,-10.6) 46(-4.25,-10.6) 47(-3.75,-10.6) 48(-3.25,-10.6) 49(-2.75,-10.6) 50(-2.25,-10.6) 51(-1.75,-10.6) 52(-1.25,-10.6) 53(-0.75,-10.6) 54(-0.25,-10.6) 55(0.25,-10.6) 56(0.75,-10.6) 57(1.25,-10.6) 58(1.75,-10.6) 59(2.25,-10.6) 60(2.75,-10.6) 61(3.25,-10.6) 62(3.75,-10.6) 63(4.25,-10.6) 64(4.75,-10.6) 65(5.25,-10.6) 66(5.75,-10.6) 67(6.25,-10.6) 68(6.75,-10.6) 69(7.25,-10.6) 70(7.75,-10.6) 71(8.25,-10.6) 72(8.75,-10.6) 109(8.75,10.6) 110(8.25,10.6) 111(7.75,10.6) 112(7.25,10.6) 113(6.75,10.6) 114(6.25,10.6) 115(5.75,10.6) 116(5.25,10.6) 117(4.75,10.6) 118(4.25,10.6) 119(3.75,10.6) 120(3.25,10.6) 121(2.75,10.6) 122(2.25,10.6) 123(1.75,10.6) 124(1.25,10.6) 125(0.75,10.6) 126(0.25,10.6) 127(-0.25,10.6) 128(-0.75,10.6) 129(-1.25,10.6) 130(-1.75,10.6) 131(-2.25,10.6) 132(-2.75,10.6) 133(-3.25,10.6) 134(-3.75,10.6) 135(-4.25,10.6) 136(-4.75,10.6) 137(-5.25,10.6) 138(-5.75,10.6) 139(-6.25,10.6) 140(-6.75,10.6) 141(-7.25,10.6) 142(-7.75,10.6) 143(-8.25,10.6) 144(-8.75,10.6)
  silkscreen extent -10.72,-9.15 9.15,9.58, body extent -10,-10 10,10, height 1.6
PCBComponent_1 [mm]
  rect 1.9x1.5 smd: 1(-3.876,0.059) 2(4.124,0.059)
  silkscreen extent -3.01,-1.61 2.99,1.69, body extent -3.87,-1.8 4.13,1.8, height 2.5
RESC2013X60X35ML10T20 [mm] "Chip Resistor, 2-Leads, Body 2.1x1.35mm, IPC Low Density"
  rect 1.2x1.45 smd: 1(-1,0) 2(1,0)
  silkscreen extent -0.1,-0.63 0.1,0.63, body extent -1.05,-0.68 1.05,0.67, height 0.6
SAMTEC_MTLW-102-XX-X-D-XXX [mm]
  round 1.52 hole 1.02: 01(-1.27,-1.27) 02(-1.27,1.27) 03(1.27,-1.27) 04(1.27,1.27)
  Top Layer region: 1.335,2.03 1.364,2.027 1.398,2.022 1.433,2.016 1.467,2.008 1.5,1.998 1.533,1.987 1.566,1.975 1.598,1.961 1.629,1.945 1.66,1.928 1.69,1.91 1.719,1.89 1.746,1.869 1.773,1.847 1.799,1.823 1.824,1.799 1.848,1.773 1.87,1.746 1.891,1.718 1.911,1.69 1.93,1.66 1.947,1.63 1.963,1.598 1.977,1.566 1.99,1.534 2.001,1.501 2.011,1.467 2.019,1.433 2.026,1.399 2.03,1.37 2.03,1.27 2.029,1.23 2.026,1.191 2.021,1.151 2.013,1.112 2.004,1.073 1.993,1.035 1.98,0.998 1.964,0.961 1.947,0.925 1.928,0.89 1.907,0.856 1.885,0.823 1.861,0.792 1.835,0.761 1.807,0.733 1.779,0.705 1.748,0.679 1.717,0.655 1.684,0.633 1.65,0.612 1.615,0.593 1.579,0.576 1.542,0.56 1.505,0.547 1.467,0.536 1.428,0.527 1.389,0.519 1.349,0.514 1.31,0.511 1.27,0.51 1.23,0.511 1.191,0.514 1.151,0.519 1.112,0.527 1.073,0.536 1.035,0.547 0.998,0.56 0.961,0.576 0.925,0.593 0.89,0.612 0.856,0.633 0.823,0.655 0.792,0.679 0.761,0.705 0.733,0.733 0.705,0.761 0.679,0.792 0.655,0.823 0.633,0.856 0.612,0.89 0.593,0.925 0.576,0.961 0.56,0.998 0.547,1.035 0.536,1.073 0.527,1.112 0.519,1.151 0.514,1.191 0.511,1.23 0.51,1.27 0.51,1.37 0.514,1.399 0.521,1.433 0.529,1.467 0.539,1.501 0.55,1.534 0.563,1.566 0.577,1.598 0.593,1.63 0.61,1.66 0.629,1.69 0.649,1.718 0.67,1.746 0.692,1.773 0.716,1.799 0.741,1.823 0.767,1.847 0.794,1.869 0.821,1.89 0.85,1.91 0.88,1.928 0.911,1.945 0.942,1.961 0.974,1.975 1.007,1.987 1.04,1.998 1.073,2.008 1.107,2.016 1.142,2.022 1.176,2.027 1.205,2.03 1.205,2.8 1.335,2.8
  Top Layer region: 1.349,-0.514 1.428,-0.527 1.505,-0.547 1.579,-0.576 1.65,-0.612 1.717,-0.655 1.779,-0.705 1.835,-0.761 1.885,-0.823 1.928,-0.89 1.964,-0.961 1.993,-1.035 2.013,-1.112 2.026,-1.191 2.03,-1.27 2.029,-1.308 2.026,-1.346 2.022,-1.383 2.015,-1.421 2.007,-1.457 1.997,-1.494 1.985,-1.529 1.971,-1.564 1.956,-1.599 1.939,-1.633 1.92,-1.665 1.9,-1.697 1.878,-1.728 1.855,-1.757 1.83,-1.786 1.804,-1.813 1.776,-1.839 1.747,-1.863 1.718,-1.886 1.687,-1.908 1.655,-1.928 1.622,-1.946 1.588,-1.962 1.553,-1.977 1.518,-1.991 1.482,-2.002 1.446,-2.012 1.409,-2.02 1.372,-2.026 1.335,-2.03 1.335,-2.8 1.205,-2.8 1.205,-2.03 1.168,-2.026 1.131,-2.02 1.094,-2.012 1.058,-2.002 1.022,-1.991 0.987,-1.977 0.952,-1.962 0.918,-1.946 0.885,-1.928 0.853,-1.908 0.822,-1.886 0.793,-1.863 0.764,-1.839 0.736,-1.813 0.71,-1.786 0.685,-1.757 0.662,-1.728 0.64,-1.697 0.62,-1.665 0.601,-1.633 0.584,-1.599 0.569,-1.564 0.555,-1.529 0.543,-1.494 0.533,-1.457 0.525,-1.421 0.518,-1.383 0.514,-1.346 0.511,-1.308 0.51,-1.27 0.514,-1.191 0.527,-1.112 0.547,-1.035 0.576,-0.961 0.612,-0.89 0.655,-0.823 0.705,-0.761 0.761,-0.705 0.823,-0.655 0.89,-0.612 0.961,-0.576 1.035,-0.547 1.112,-0.527 1.191,-0.514 1.27,-0.51
  Top Layer region: -1.205,2.03 -1.176,2.027 -1.142,2.022 -1.107,2.016 -1.073,2.008 -1.04,1.998 -1.007,1.987 -0.974,1.975 -0.942,1.961 -0.911,1.945 -0.88,1.928 -0.85,1.91 -0.821,1.89 -0.794,1.869 -0.767,1.847 -0.741,1.823 -0.716,1.799 -0.692,1.773 -0.67,1.746 -0.649,1.718 -0.629,1.69 -0.61,1.66 -0.593,1.63 -0.577,1.598 -0.563,1.566 -0.55,1.534 -0.539,1.501 -0.529,1.467 -0.521,1.433 -0.514,1.399 -0.51,1.37 -0.51,1.27 -0.511,1.23 -0.514,1.191 -0.519,1.151 -0.527,1.112 -0.536,1.073 -0.547,1.035 -0.56,0.998 -0.576,0.961 -0.593,0.925 -0.612,0.89 -0.633,0.856 -0.655,0.823 -0.679,0.792 -0.705,0.761 -0.733,0.733 -0.761,0.705 -0.792,0.679 -0.823,0.655 -0.856,0.633 -0.89,0.612 -0.925,0.593 -0.961,0.576 -0.998,0.56 -1.035,0.547 -1.073,0.536 -1.112,0.527 -1.151,0.519 -1.191,0.514 -1.23,0.511 -1.27,0.51 -1.31,0.511 -1.349,0.514 -1.389,0.519 -1.428,0.527 -1.467,0.536 -1.505,0.547 -1.542,0.56 -1.579,0.576 -1.615,0.593 -1.65,0.612 -1.684,0.633 -1.717,0.655 -1.748,0.679 -1.779,0.705 -1.807,0.733 -1.835,0.761 -1.861,0.792 -1.885,0.823 -1.907,0.856 -1.928,0.89 -1.947,0.925 -1.964,0.961 -1.98,0.998 -1.993,1.035 -2.004,1.073 -2.013,1.112 -2.021,1.151 -2.026,1.191 -2.029,1.23 -2.03,1.27 -2.03,1.37 -2.026,1.399 -2.019,1.433 -2.011,1.467 -2.001,1.501 -1.99,1.534 -1.977,1.566 -1.963,1.598 -1.947,1.63 -1.93,1.66 -1.911,1.69 -1.891,1.718 -1.87,1.746 -1.848,1.773 -1.824,1.799 -1.799,1.823 -1.773,1.847 -1.746,1.869 -1.719,1.89 -1.69,1.91 -1.66,1.928 -1.629,1.945 -1.598,1.961 -1.566,1.975 -1.533,1.987 -1.5,1.998 -1.467,2.008 -1.433,2.016 -1.398,2.022 -1.364,2.027 -1.335,2.03 -1.335,2.8 -1.205,2.8
  Top Layer region: -1.191,-0.514 -1.112,-0.527 -1.035,-0.547 -0.961,-0.576 -0.89,-0.612 -0.823,-0.655 -0.761,-0.705 -0.705,-0.761 -0.655,-0.823 -0.612,-0.89 -0.576,-0.961 -0.547,-1.035 -0.527,-1.112 -0.514,-1.191 -0.51,-1.27 -0.511,-1.308 -0.514,-1.346 -0.518,-1.383 -0.525,-1.421 -0.533,-1.457 -0.543,-1.494 -0.555,-1.529 -0.569,-1.564 -0.584,-1.599 -0.601,-1.633 -0.62,-1.665 -0.64,-1.697 -0.662,-1.728 -0.685,-1.757 -0.71,-1.786 -0.736,-1.813 -0.764,-1.839 -0.793,-1.863 -0.822,-1.886 -0.853,-1.908 -0.885,-1.928 -0.918,-1.946 -0.952,-1.962 -0.987,-1.977 -1.022,-1.991 -1.058,-2.002 -1.094,-2.012 -1.131,-2.02 -1.168,-2.026 -1.205,-2.03 -1.205,-2.8 -1.335,-2.8 -1.335,-2.03 -1.372,-2.026 -1.409,-2.02 -1.446,-2.012 -1.482,-2.002 -1.518,-1.991 -1.553,-1.977 -1.588,-1.962 -1.622,-1.946 -1.655,-1.928 -1.687,-1.908 -1.718,-1.886 -1.747,-1.863 -1.776,-1.839 -1.804,-1.813 -1.83,-1.786 -1.855,-1.757 -1.878,-1.728 -1.9,-1.697 -1.92,-1.665 -1.939,-1.633 -1.956,-1.599 -1.971,-1.564 -1.985,-1.529 -1.997,-1.494 -2.007,-1.457 -2.015,-1.421 -2.022,-1.383 -2.026,-1.346 -2.029,-1.308 -2.03,-1.27 -2.026,-1.191 -2.013,-1.112 -1.993,-1.035 -1.964,-0.961 -1.928,-0.89 -1.885,-0.823 -1.835,-0.761 -1.779,-0.705 -1.717,-0.655 -1.65,-0.612 -1.579,-0.576 -1.505,-0.547 -1.428,-0.527 -1.349,-0.514 -1.27,-0.51
  silkscreen extent -3.29,-2.51 2.66,2.51
SAMTEC_MTLW-104-06-G-D-160 [mm]
  round 1.52 hole 1.02: 01(-3.81,-1.27) 02(-3.81,1.27) 03(-1.27,-1.27) 04(-1.27,1.27) 05(1.27,-1.27) 06(1.27,1.27) 07(3.81,-1.27) 08(3.81,1.27)
  Top Layer region: 3.875,2.03 3.904,2.027 3.938,2.022 3.973,2.016 4.007,2.008 4.04,1.998 4.073,1.987 4.106,1.975 4.138,1.961 4.169,1.945 4.2,1.928 4.23,1.91 4.259,1.89 4.286,1.869 4.313,1.847 4.339,1.823 4.364,1.799 4.388,1.773 4.41,1.746 4.431,1.718 4.451,1.69 4.47,1.66 4.487,1.63 4.503,1.598 4.517,1.566 4.53,1.534 4.541,1.501 4.551,1.467 4.559,1.433 4.566,1.399 4.57,1.37 4.57,1.27 4.569,1.23 4.566,1.191 4.561,1.151 4.553,1.112 4.544,1.073 4.533,1.035 4.52,0.998 4.504,0.961 4.487,0.925 4.468,0.89 4.447,0.856 4.425,0.823 4.401,0.792 4.375,0.761 4.347,0.733 4.319,0.705 4.288,0.679 4.257,0.655 4.224,0.633 4.19,0.612 4.155,0.593 4.119,0.576 4.082,0.56 4.045,0.547 4.007,0.536 3.968,0.527 3.929,0.519 3.889,0.514 3.85,0.511 3.81,0.51 3.77,0.511 3.731,0.514 3.691,0.519 3.652,0.527 3.613,0.536 3.575,0.547 3.538,0.56 3.501,0.576 3.465,0.593 3.43,0.612 3.396,0.633 3.363,0.655 3.332,0.679 3.301,0.705 3.273,0.733 3.245,0.761 3.219,0.792 3.195,0.823 3.173,0.856 3.152,0.89 3.133,0.925 3.116,0.961 3.1,0.998 3.087,1.035 3.076,1.073 3.067,1.112 3.059,1.151 3.054,1.191 3.051,1.23 3.05,1.27 3.05,1.37 3.054,1.399 3.061,1.433 3.069,1.467 3.079,1.501 3.09,1.534 3.103,1.566 3.117,1.598 3.133,1.63 3.15,1.66 3.169,1.69 3.189,1.718 3.21,1.746 3.232,1.773 3.256,1.799 3.281,1.823 3.307,1.847 3.334,1.869 3.361,1.89 3.39,1.91 3.42,1.928 3.451,1.945 3.482,1.961 3.514,1.975 3.547,1.987 3.58,1.998 3.613,2.008 3.647,2.016 3.682,2.022 3.716,2.027 3.745,2.03 3.745,2.8 3.875,2.8
  Top Layer region: 3.889,-0.514 3.968,-0.527 4.045,-0.547 4.119,-0.576 4.19,-0.612 4.257,-0.655 4.319,-0.705 4.375,-0.761 4.425,-0.823 4.468,-0.89 4.504,-0.961 4.533,-1.035 4.553,-1.112 4.566,-1.191 4.57,-1.27 4.569,-1.308 4.566,-1.346 4.562,-1.383 4.555,-1.421 4.547,-1.457 4.537,-1.494 4.525,-1.529 4.511,-1.564 4.496,-1.599 4.479,-1.633 4.46,-1.665 4.44,-1.697 4.418,-1.728 4.395,-1.757 4.37,-1.786 4.344,-1.813 4.316,-1.839 4.287,-1.863 4.258,-1.886 4.227,-1.908 4.195,-1.928 4.162,-1.946 4.128,-1.962 4.093,-1.977 4.058,-1.991 4.022,-2.002 3.986,-2.012 3.949,-2.02 3.912,-2.026 3.875,-2.03 3.875,-2.8 3.745,-2.8 3.745,-2.03 3.708,-2.026 3.671,-2.02 3.634,-2.012 3.598,-2.002 3.562,-1.991 3.527,-1.977 3.492,-1.962 3.458,-1.946 3.425,-1.928 3.393,-1.908 3.362,-1.886 3.333,-1.863 3.304,-1.839 3.276,-1.813 3.25,-1.786 3.225,-1.757 3.202,-1.728 3.18,-1.697 3.16,-1.665 3.141,-1.633 3.124,-1.599 3.109,-1.564 3.095,-1.529 3.083,-1.494 3.073,-1.457 3.065,-1.421 3.058,-1.383 3.054,-1.346 3.051,-1.308 3.05,-1.27 3.054,-1.191 3.067,-1.112 3.087,-1.035 3.116,-0.961 3.152,-0.89 3.195,-0.823 3.245,-0.761 3.301,-0.705 3.363,-0.655 3.43,-0.612 3.501,-0.576 3.575,-0.547 3.652,-0.527 3.731,-0.514 3.81,-0.51
  Top Layer region: 1.335,2.03 1.364,2.027 1.398,2.022 1.433,2.016 1.467,2.008 1.5,1.998 1.533,1.987 1.566,1.975 1.598,1.961 1.629,1.945 1.66,1.928 1.69,1.91 1.719,1.89 1.746,1.869 1.773,1.847 1.799,1.823 1.824,1.799 1.848,1.773 1.87,1.746 1.891,1.718 1.911,1.69 1.93,1.66 1.947,1.63 1.963,1.598 1.977,1.566 1.99,1.534 2.001,1.501 2.011,1.467 2.019,1.433 2.026,1.399 2.03,1.37 2.03,1.27 2.029,1.23 2.026,1.191 2.021,1.151 2.013,1.112 2.004,1.073 1.993,1.035 1.98,0.998 1.964,0.961 1.947,0.925 1.928,0.89 1.907,0.856 1.885,0.823 1.861,0.792 1.835,0.761 1.807,0.733 1.779,0.705 1.748,0.679 1.717,0.655 1.684,0.633 1.65,0.612 1.615,0.593 1.579,0.576 1.542,0.56 1.505,0.547 1.467,0.536 1.428,0.527 1.389,0.519 1.349,0.514 1.31,0.511 1.27,0.51 1.23,0.511 1.191,0.514 1.151,0.519 1.112,0.527 1.073,0.536 1.035,0.547 0.998,0.56 0.961,0.576 0.925,0.593 0.89,0.612 0.856,0.633 0.823,0.655 0.792,0.679 0.761,0.705 0.733,0.733 0.705,0.761 0.679,0.792 0.655,0.823 0.633,0.856 0.612,0.89 0.593,0.925 0.576,0.961 0.56,0.998 0.547,1.035 0.536,1.073 0.527,1.112 0.519,1.151 0.514,1.191 0.511,1.23 0.51,1.27 0.51,1.37 0.514,1.399 0.521,1.433 0.529,1.467 0.539,1.501 0.55,1.534 0.563,1.566 0.577,1.598 0.593,1.63 0.61,1.66 0.629,1.69 0.649,1.718 0.67,1.746 0.692,1.773 0.716,1.799 0.741,1.823 0.767,1.847 0.794,1.869 0.821,1.89 0.85,1.91 0.88,1.928 0.911,1.945 0.942,1.961 0.974,1.975 1.007,1.987 1.04,1.998 1.073,2.008 1.107,2.016 1.142,2.022 1.176,2.027 1.205,2.03 1.205,2.8 1.335,2.8
  Top Layer region: 1.349,-0.514 1.428,-0.527 1.505,-0.547 1.579,-0.576 1.65,-0.612 1.717,-0.655 1.779,-0.705 1.835,-0.761 1.885,-0.823 1.928,-0.89 1.964,-0.961 1.993,-1.035 2.013,-1.112 2.026,-1.191 2.03,-1.27 2.029,-1.308 2.026,-1.346 2.022,-1.383 2.015,-1.421 2.007,-1.457 1.997,-1.494 1.985,-1.529 1.971,-1.564 1.956,-1.599 1.939,-1.633 1.92,-1.665 1.9,-1.697 1.878,-1.728 1.855,-1.757 1.83,-1.786 1.804,-1.813 1.776,-1.839 1.747,-1.863 1.718,-1.886 1.687,-1.908 1.655,-1.928 1.622,-1.946 1.588,-1.962 1.553,-1.977 1.518,-1.991 1.482,-2.002 1.446,-2.012 1.409,-2.02 1.372,-2.026 1.335,-2.03 1.335,-2.8 1.205,-2.8 1.205,-2.03 1.168,-2.026 1.131,-2.02 1.094,-2.012 1.058,-2.002 1.022,-1.991 0.987,-1.977 0.952,-1.962 0.918,-1.946 0.885,-1.928 0.853,-1.908 0.822,-1.886 0.793,-1.863 0.764,-1.839 0.736,-1.813 0.71,-1.786 0.685,-1.757 0.662,-1.728 0.64,-1.697 0.62,-1.665 0.601,-1.633 0.584,-1.599 0.569,-1.564 0.555,-1.529 0.543,-1.494 0.533,-1.457 0.525,-1.421 0.518,-1.383 0.514,-1.346 0.511,-1.308 0.51,-1.27 0.514,-1.191 0.527,-1.112 0.547,-1.035 0.576,-0.961 0.612,-0.89 0.655,-0.823 0.705,-0.761 0.761,-0.705 0.823,-0.655 0.89,-0.612 0.961,-0.576 1.035,-0.547 1.112,-0.527 1.191,-0.514 1.27,-0.51
  Top Layer region: -1.205,2.03 -1.176,2.027 -1.142,2.022 -1.107,2.016 -1.073,2.008 -1.04,1.998 -1.007,1.987 -0.974,1.975 -0.942,1.961 -0.911,1.945 -0.88,1.928 -0.85,1.91 -0.821,1.89 -0.794,1.869 -0.767,1.847 -0.741,1.823 -0.716,1.799 -0.692,1.773 -0.67,1.746 -0.649,1.718 -0.629,1.69 -0.61,1.66 -0.593,1.63 -0.577,1.598 -0.563,1.566 -0.55,1.534 -0.539,1.501 -0.529,1.467 -0.521,1.433 -0.514,1.399 -0.51,1.37 -0.51,1.27 -0.511,1.23 -0.514,1.191 -0.519,1.151 -0.527,1.112 -0.536,1.073 -0.547,1.035 -0.56,0.998 -0.576,0.961 -0.593,0.925 -0.612,0.89 -0.633,0.856 -0.655,0.823 -0.679,0.792 -0.705,0.761 -0.733,0.733 -0.761,0.705 -0.792,0.679 -0.823,0.655 -0.856,0.633 -0.89,0.612 -0.925,0.593 -0.961,0.576 -0.998,0.56 -1.035,0.547 -1.073,0.536 -1.112,0.527 -1.151,0.519 -1.191,0.514 -1.23,0.511 -1.27,0.51 -1.31,0.511 -1.349,0.514 -1.389,0.519 -1.428,0.527 -1.467,0.536 -1.505,0.547 -1.542,0.56 -1.579,0.576 -1.615,0.593 -1.65,0.612 -1.684,0.633 -1.717,0.655 -1.748,0.679 -1.779,0.705 -1.807,0.733 -1.835,0.761 -1.861,0.792 -1.885,0.823 -1.907,0.856 -1.928,0.89 -1.947,0.925 -1.964,0.961 -1.98,0.998 -1.993,1.035 -2.004,1.073 -2.013,1.112 -2.021,1.151 -2.026,1.191 -2.029,1.23 -2.03,1.27 -2.03,1.37 -2.026,1.399 -2.019,1.433 -2.011,1.467 -2.001,1.501 -1.99,1.534 -1.977,1.566 -1.963,1.598 -1.947,1.63 -1.93,1.66 -1.911,1.69 -1.891,1.718 -1.87,1.746 -1.848,1.773 -1.824,1.799 -1.799,1.823 -1.773,1.847 -1.746,1.869 -1.719,1.89 -1.69,1.91 -1.66,1.928 -1.629,1.945 -1.598,1.961 -1.566,1.975 -1.533,1.987 -1.5,1.998 -1.467,2.008 -1.433,2.016 -1.398,2.022 -1.364,2.027 -1.335,2.03 -1.335,2.8 -1.205,2.8
  Top Layer region: -1.191,-0.514 -1.112,-0.527 -1.035,-0.547 -0.961,-0.576 -0.89,-0.612 -0.823,-0.655 -0.761,-0.705 -0.705,-0.761 -0.655,-0.823 -0.612,-0.89 -0.576,-0.961 -0.547,-1.035 -0.527,-1.112 -0.514,-1.191 -0.51,-1.27 -0.511,-1.308 -0.514,-1.346 -0.518,-1.383 -0.525,-1.421 -0.533,-1.457 -0.543,-1.494 -0.555,-1.529 -0.569,-1.564 -0.584,-1.599 -0.601,-1.633 -0.62,-1.665 -0.64,-1.697 -0.662,-1.728 -0.685,-1.757 -0.71,-1.786 -0.736,-1.813 -0.764,-1.839 -0.793,-1.863 -0.822,-1.886 -0.853,-1.908 -0.885,-1.928 -0.918,-1.946 -0.952,-1.962 -0.987,-1.977 -1.022,-1.991 -1.058,-2.002 -1.094,-2.012 -1.131,-2.02 -1.168,-2.026 -1.205,-2.03 -1.205,-2.8 -1.335,-2.8 -1.335,-2.03 -1.372,-2.026 -1.409,-2.02 -1.446,-2.012 -1.482,-2.002 -1.518,-1.991 -1.553,-1.977 -1.588,-1.962 -1.622,-1.946 -1.655,-1.928 -1.687,-1.908 -1.718,-1.886 -1.747,-1.863 -1.776,-1.839 -1.804,-1.813 -1.83,-1.786 -1.855,-1.757 -1.878,-1.728 -1.9,-1.697 -1.92,-1.665 -1.939,-1.633 -1.956,-1.599 -1.971,-1.564 -1.985,-1.529 -1.997,-1.494 -2.007,-1.457 -2.015,-1.421 -2.022,-1.383 -2.026,-1.346 -2.029,-1.308 -2.03,-1.27 -2.026,-1.191 -2.013,-1.112 -1.993,-1.035 -1.964,-0.961 -1.928,-0.89 -1.885,-0.823 -1.835,-0.761 -1.779,-0.705 -1.717,-0.655 -1.65,-0.612 -1.579,-0.576 -1.505,-0.547 -1.428,-0.527 -1.349,-0.514 -1.27,-0.51
  Top Layer region: -3.745,2.03 -3.716,2.027 -3.682,2.022 -3.647,2.016 -3.613,2.008 -3.58,1.998 -3.547,1.987 -3.514,1.975 -3.482,1.961 -3.451,1.945 -3.42,1.928 -3.39,1.91 -3.361,1.89 -3.334,1.869 -3.307,1.847 -3.281,1.823 -3.256,1.799 -3.232,1.773 -3.21,1.746 -3.189,1.718 -3.169,1.69 -3.15,1.66 -3.133,1.63 -3.117,1.598 -3.103,1.566 -3.09,1.534 -3.079,1.501 -3.069,1.467 -3.061,1.433 -3.054,1.399 -3.05,1.37 -3.05,1.27 -3.051,1.23 -3.054,1.191 -3.059,1.151 -3.067,1.112 -3.076,1.073 -3.087,1.035 -3.1,0.998 -3.116,0.961 -3.133,0.925 -3.152,0.89 -3.173,0.856 -3.195,0.823 -3.219,0.792 -3.245,0.761 -3.273,0.733 -3.301,0.705 -3.332,0.679 -3.363,0.655 -3.396,0.633 -3.43,0.612 -3.465,0.593 -3.501,0.576 -3.538,0.56 -3.575,0.547 -3.613,0.536 -3.652,0.527 -3.691,0.519 -3.731,0.514 -3.77,0.511 -3.81,0.51 -3.85,0.511 -3.889,0.514 -3.929,0.519 -3.968,0.527 -4.007,0.536 -4.045,0.547 -4.082,0.56 -4.119,0.576 -4.155,0.593 -4.19,0.612 -4.224,0.633 -4.257,0.655 -4.288,0.679 -4.319,0.705 -4.347,0.733 -4.375,0.761 -4.401,0.792 -4.425,0.823 -4.447,0.856 -4.468,0.89 -4.487,0.925 -4.504,0.961 -4.52,0.998 -4.533,1.035 -4.544,1.073 -4.553,1.112 -4.561,1.151 -4.566,1.191 -4.569,1.23 -4.57,1.27 -4.57,1.37 -4.566,1.399 -4.559,1.433 -4.551,1.467 -4.541,1.501 -4.53,1.534 -4.517,1.566 -4.503,1.598 -4.487,1.63 -4.47,1.66 -4.451,1.69 -4.431,1.718 -4.41,1.746 -4.388,1.773 -4.364,1.799 -4.339,1.823 -4.313,1.847 -4.286,1.869 -4.259,1.89 -4.23,1.91 -4.2,1.928 -4.169,1.945 -4.138,1.961 -4.106,1.975 -4.073,1.987 -4.04,1.998 -4.007,2.008 -3.973,2.016 -3.938,2.022 -3.904,2.027 -3.875,2.03 -3.875,2.8 -3.745,2.8
  Top Layer region: -3.731,-0.514 -3.652,-0.527 -3.575,-0.547 -3.501,-0.576 -3.43,-0.612 -3.363,-0.655 -3.301,-0.705 -3.245,-0.761 -3.195,-0.823 -3.152,-0.89 -3.116,-0.961 -3.087,-1.035 -3.067,-1.112 -3.054,-1.191 -3.05,-1.27 -3.051,-1.308 -3.054,-1.346 -3.058,-1.383 -3.065,-1.421 -3.073,-1.457 -3.083,-1.494 -3.095,-1.529 -3.109,-1.564 -3.124,-1.599 -3.141,-1.633 -3.16,-1.665 -3.18,-1.697 -3.202,-1.728 -3.225,-1.757 -3.25,-1.786 -3.276,-1.813 -3.304,-1.839 -3.333,-1.863 -3.362,-1.886 -3.393,-1.908 -3.425,-1.928 -3.458,-1.946 -3.492,-1.962 -3.527,-1.977 -3.562,-1.991 -3.598,-2.002 -3.634,-2.012 -3.671,-2.02 -3.708,-2.026 -3.745,-2.03 -3.745,-2.8 -3.875,-2.8 -3.875,-2.03 -3.912,-2.026 -3.949,-2.02 -3.986,-2.012 -4.022,-2.002 -4.058,-1.991 -4.093,-1.977 -4.128,-1.962 -4.162,-1.946 -4.195,-1.928 -4.227,-1.908 -4.258,-1.886 -4.287,-1.863 -4.316,-1.839 -4.344,-1.813 -4.37,-1.786 -4.395,-1.757 -4.418,-1.728 -4.44,-1.697 -4.46,-1.665 -4.479,-1.633 -4.496,-1.599 -4.511,-1.564 -4.525,-1.529 -4.537,-1.494 -4.547,-1.457 -4.555,-1.421 -4.562,-1.383 -4.566,-1.346 -4.569,-1.308 -4.57,-1.27 -4.566,-1.191 -4.553,-1.112 -4.533,-1.035 -4.504,-0.961 -4.468,-0.89 -4.425,-0.823 -4.375,-0.761 -4.319,-0.705 -4.257,-0.655 -4.19,-0.612 -4.119,-0.576 -4.045,-0.547 -3.968,-0.527 -3.889,-0.514 -3.81,-0.51
  silkscreen extent -5.83,-2.51 5.08,2.51
SOT95P280X145-6N [mm]
  rect 1.2x0.6 smd: 1(-1.25,0.95) 2(-1.25,0) 3(-1.25,-0.95) 4(1.25,-0.95) 5(1.25,0) 6(1.25,0.95)
  silkscreen extent -1.85,-1.46 0.3,1.6, body extent -1.4,-1.46 1.4,1.46, height 0.4
USB-MICRO-B_V [mm] "USB, MICRO B, Body 7.491x4.695 mm, Pitch 0.65 mm"
  rect 0.4x1.35 smd: 1(-1.3,1.35) 2(-0.65,1.35) 3(0,1.35) 4(0.65,1.35) 5(1.3,1.35)
  round 1.45 hole 0.85: 6(-2.5,1.35) 7(2.5,1.35)
  rrect50% 0x0 hole 0.6 slot 1.3 at 90 deg: 8(-3.5,-1.35) 11(3.5,-1.35)
  rect 1.5x1.9 smd: 9(-1,-1.35) 10(1,-1.35)
  Top Layer circle w0.5: c3.6,-0.9 r0.25
  Top Layer circle w0.5: c-3.6,-1.8 r0.25
  Top Layer region: -2.3,-2.3 -2.3,-0.4 -3.6,-0.4 -3.6,-2.3
  Top Layer region: 2.3,-0.4 2.3,-2.3 3.6,-2.3 3.6,-0.4
  Top Layer region: 3.6,-0.9 3.6,-1.8 4.1,-1.8 4.1,-0.9
  Top Layer region: -3.6,-1.8 -3.6,-0.9 -4.1,-0.9 -4.1,-1.8
  Top Layer lines w0.5: 3.8,-1.65 ccw(c3.6,-1.8) 3.75,-1.6 ccw(c3.6,-1.8) 3.6,-1.55 ccw(c3.6,-1.8) 3.8,-1.65 ; -3.737,-1.109 cw(c-3.6,-0.9) -3.85,-0.9 cw(c-3.6,-0.9) -3.737,-0.691 cw(c-3.6,-0.9) -3.6,-0.65 cw(c-3.6,-0.9) -3.737,-1.109
  silkscreen extent -3.75,-3.5 3.75,2.7, body extent -4.1,-3.9 4.1,1.5, height 2.67
WINB-SOIC-8_M [mm] "SOIC, 8-Leads, Body 5.4x5.4mm, Pitch 1.27mm, IPC Low Density"
  oval 1.9x0.65 smd: 1(-3.65,1.905) 2(-3.65,0.635) 3(-3.65,-0.635) 4(-3.65,-1.905) 5(3.65,-1.905) 6(3.65,-0.635) 7(3.65,0.635) 8(3.65,1.905)
  silkscreen extent -3.77,-2.7 2.3,2.9, body extent -2.7,-2.7 2.7,2.7, height 2.16

## Part data
C1 C2 C8 C9 C10 C11 C13 C14 C17 C18 C19 C20 C21 C22 C25 C26 C27 C28 C29 C30 C31 C32 C33 C34: library part CMP-13271-003679-1, "CL21 Series 0805 100nF 16V ±10% Tolerance X7R Multilayer Ceramic Chip Capacitor", Capacitance=100nF, Case Code (Imperial)=0805, Case Code (Metric)=2012, Dielectric=X7R, Max Operating Temperature=125°C, Min Operating Temperature=-55°C, Package Quantity=1, Tolerance=10%, Voltage Rating=16V, Case/Package=0805, Depth=1.25mm, Height=0.65mm, Lead Free="Lead Free", Length=2mm, Mount="Surface Mount", Packaging="Tape and Reel", Radiation Hardening=No, Thickness=0.03inch, Voltage Rating (DC)=16V, Width=0.049inch
C3 C4: library part CMP-2007-00441-2, "CAP CER 12PF 50V C0G/NP0 0805", Capacitance="6 pF", Manufacturer=KEMET, Package=C0805C-DN, Temperature="-55°C to +125°C", Temperature Characteristic=C0G, Temperature Coefficient=30ppm/°C, Temperature Range High=+125°C, Temperature Range Low=-55°C, Tolerance=0.05, Voltage Rating="50 V", Automotive=No, Category=Cap, ComponentLink2Description=Datasheet, ComponentLink2URL=https://content.kemet.com/datasheets/KEM_C1003_C0G_SMD.pdf, Device Class L1="Passive Components", Device Class L2=Capacitors, Device Class L3="Ceramic Capacitors", Digikey Description="CAP CER 12PF 50V C0G/NP0 0805", Height=0.88mm, Ipc Land Pattern Name=CAPC200125X78, Lead Free=Yes, Manufacturer Part Number=C0805C120J5GACTU, Material=Ceramic, Mouser Description="Multilayer Ceramic Capacitors MLCC - SMD/SMT 50volts 12pF C0G 5%", Octopart=https://octopart.com/c0805c120j5gactu-kemet-126518, RoHS=TRUE
C5 C6: library part CMP-2007-00441-2, "CAP CER 12PF 50V C0G/NP0 0805", Capacitance="18 pF", Manufacturer=KEMET, Package=C0805C-DN, Temperature="-55°C to +125°C", Temperature Characteristic=C0G, Temperature Coefficient=30ppm/°C, Temperature Range High=+125°C, Temperature Range Low=-55°C, Tolerance=0.05, Voltage Rating="50 V", Automotive=No, Category=Cap, ComponentLink2Description=Datasheet, ComponentLink2URL=https://content.kemet.com/datasheets/KEM_C1003_C0G_SMD.pdf, Device Class L1="Passive Components", Device Class L2=Capacitors, Device Class L3="Ceramic Capacitors", Digikey Description="CAP CER 12PF 50V C0G/NP0 0805", Height=0.88mm, Ipc Land Pattern Name=CAPC200125X78, Lead Free=Yes, Manufacturer Part Number=C0805C120J5GACTU, Material=Ceramic, Mouser Description="Multilayer Ceramic Capacitors MLCC - SMD/SMT 50volts 12pF C0G 5%", Octopart=https://octopart.com/c0805c120j5gactu-kemet-126518, RoHS=TRUE
C7 C12: library part CMP-13271-001347-1, "CL21 Series 0805 2.2uF 16V ±10% Tolerance X5R Multilayer Ceramic Chip Capacitor", Capacitance=2.2uF, Case Code (Imperial)=0805, Case Code (Metric)=2012, Max Operating Temperature=85°C, Min Operating Temperature=-55°C, Package Quantity=3000, Tolerance=10%, Voltage Rating=16V, Case/Package=0805, Length=0.079inch, Mount="Surface Mount", Packaging="Tape and Reel", Thickness=0.053inch, Width=0.049inch
C15 C37: library part CMP-03422-000173-1, "CAP CER 4.7UF 50V X7R 1206", Capacitance="4.7 uF", Manufacturer=Yageo, Package=CC1206-1.25, Temperature="-55°C to +125°C", Temperature Characteristic=X7R, Temperature Coefficient=15%, Temperature Range High=+125°C, Temperature Range Low=-55°C, Tolerance=0.1, Voltage Rating="50 V", Automotive=No, Automotive Grade=NA, Category=Cap, ComponentLink2Description=Datasheet, ComponentLink2URL=http://www.yageo.com/documents/recent/UPY-NP0X7R_HV_1KV-to-3KV_11.pdf, Device Class L1="Passive Components", Device Class L2=Capacitors, Device Class L3="Ceramic Capacitors", Digikey Description="CAP CER 4.7UF 50V X7R 1206", Footprint Url=http://www.yageo.com/exep/pages/download/literatures/UPY-C_GEN_24.pdf, Height=1.45mm, Lead Free=Yes, Manufacturer Part Number=CC1206KKX7R9BB475, Material=Ceramic, Mouser Description="CC Series 1206 4.7 uF 50 V ±10% Tolerance X7R Multilayer Ceramic Capacitor", Octopart=https://octopart.com/cc1206kkx7r9bb475-yageo-50417574, RoHS=TRUE
C16 C42: library part CMP-2000-05866-2, "General Purpose Ceramic Capacitor, 1206, 1uF, 10%, X7R, 15%, 50V", Capacitance=1uF, Case Code (Imperial)=1206, Case Code (Metric)=3216, Dielectric=X7R, Max Operating Temperature=125°C, Min Operating Temperature=-55°C, Package Quantity=1, Tolerance=10%, Voltage=25V, Voltage Rating=50V, Case/Package=1206, Construction=Flat, Contact Plating=Tin, Depth=1.6mm, Dissipation Factor=2.5%, Height=1.78mm, Lead Free="Lead Free", Length=3.2mm, Mount="Surface Mount", Number of Pins=2, Packaging="Tape and Reel", Radiation Hardening=No, REACH SVHC="No SVHC", RoHS Compliant=Yes, Series=-, Termination=SMD/SMT, Thickness=0.07inch, Voltage Rating (DC)=50V, Width=0.063inch
C24 C35 C41: library part CMP-04427-021870-1, "General Purpose Ceramic Capacitor, 1206, 10uF, 10%, X5R, 15%, 10V", Capacitance=10uF, Case Code (Imperial)=1206, Case Code (Metric)=3216, Dielectric=X5R, Max Operating Temperature=85°C, Min Operating Temperature=-55°C, Package Quantity=1, Tolerance=10%, Voltage=10V, Case/Package=1206, Construction=Flat, Contact Plating=Tin, Depth=1.6mm, Height=0.07mm, Lead Free="Lead Free", Length=3.2mm, Mount="Surface Mount", Number of Pins=2, Packaging="Tape and Reel", Radiation Hardening=No, REACH SVHC="No SVHC", RoHS Compliant=Yes, Series=-, Size=1.78mm, Termination=SMD/SMT, Thickness=0.07inch, Voltage Rating=10V, Voltage Rating (DC)=10V, Width=0.063inch
C36 C40: library part CMP-2007-04172-2, "Automotive Ceramic Capacitor, 0805, 100nF, 10%, X7R, 15%, 100V", Case Code (Imperial)=0805, Case Code (Metric)=2012, Dielectric=X7R, Dielectric Material=Ceramic, Max Operating Temperature=125°C, Min Operating Temperature=-55°C, Package Quantity=1, Ratings=AEC-Q200, Tolerance=10%, Voltage=100V, Capacitance=100nF, Case/Package=0805, Construction=Flat, Depth=1.25mm, Height=1.4mm, Lead Free="Lead Free", Length=2.01mm, Mount="Surface Mount", Number of Pins=2, Packaging="Tape and Reel", Radiation Hardening=No, REACH SVHC="No SVHC", RoHS Compliant=Yes, Series=-, Termination=SMD/SMT, Thickness=0.055inch, Voltage Rating=100V, Voltage Rating (DC)=100V, Width=0.049inch
C38 C39: library part CMP-08246-004697-1, "Multilayer Ceramic Capacitors 22uF ±20% 25V X5R SMD 1206", Capacitance=22uF, Case Code (Imperial)=1206, Case Code (Metric)=3216, Dielectric=X5R, Dielectric Material=Ceramic, Max Operating Temperature=85°C, Min Operating Temperature=-55°C, Package Quantity=1, Tolerance=20%, Voltage Rating=25V, Case/Package=1206, Construction=Flat, Depth=1.6mm, Height=1.6mm, Lead Free="Lead Free", Length=3.2mm, Mount="Surface Mount", Packaging="Tape and Reel", REACH SVHC="No SVHC", Resistor Type=Ceramic, RoHS Compliant=Yes, Series=C, Termination=SMD/SMT, Thickness=0.071inch, Voltage Rating (DC)=25V, Weight=0.000571oz, Width=0.063inch
D1: "17V Clamp 5A (8/20µs) Ipp Tvs Diode Surface Mount SOT-23-6", Package="SOT-23-6 STMicroelectronics", Check_prices=https://www.snapeda.com/parts/USBLC6-2SC6Y/STMicroelectronics/view-part/?ref=eda, MF=STMicroelectronics, MP=USBLC6-2SC6Y, SnapEDA_Link=https://www.snapeda.com/parts/USBLC6-2SC6Y/STMicroelectronics/view-part/?ref=snap
DC-Jack1: library part CMP-1502-00188-2, Color=Black, Current Rating=5A, Flammability Rating="UL94 V-0", Insulation Resistance=100MΩ, Max Operating Temperature=85°C, Min Operating Temperature=-40°C, Operating Supply Voltage=24V, Voltage Rating (DC)=20V, Connector Type=Power, Contact Gender=Female, Contact Material="Gold, Tin", Contact Plating=Tin, Gender=Male, Height=11mm, Housing Material=Polyamide, Mount="Through Hole", NexarPartId=52676100, Number of Contacts=3, Packaging=Bulk, REACH SVHC=Unknown, RoHS=Compliant, Shielding=Unshielded, Termination="Through Hole", Voltage Rating=24V
DS1 DS2: library part CMP-2000-05062-1, "Chip LED, Green, 2.2 V, -40 to 85 degC, 2-Pin SMD, Pb-Free, Tape and Reel", Forward Current If=20mA, Forward Voltage=2.2V, Forward Voltage VF Max=2.6V, LED Colour=Green, Manufacturer=Avago, Operating Temperature Max=85degC, Operating Temperature Min=-30degC, Operating Temperature Range=-30degCto+85degC, Opto Case Style=SMD, Package Description="2-Pin Surface Mount Device, Body 2 x 1.25 mm, Height 0.8 mm", Package Reference=HSMX-C170, Storage Temperature Min=-40degC, Bulb Size=1.25mmx1.4mm, Datasheet URL=https://datasheet.ciiva.com/29280/180495-da-01-en-chip-led-hsmg-c170-gelb-gruen-29280971.pdf, Datasheet Version=Oct-08, Dominant Wavelength=572nm, Dominant Wavelength Typ=572nm, External Depth=0.8mm, External Length / Height=2mm, External Width=1.25mm, Forward Current If Max=20mA, LED Mounting=SMD, LED Type=Standard, Lens Shape=Rectangular, Light Area Height=1mm, Luminous Intensity=15mcd, Luminous Intensity Min=4mcd, Luminous Intensity Typ=15mcd, Manufacturer URL=http://www.avagotech.com/, Mounting Type=SMD, MSL=MSL2A-4weeks, No. of Pins=2, Opto Mounting Orientation=Top, Packaging=CutTape, Peak Forward Current=20mA, Peak Wavelength=570nm, PIV Max=5V, Storage Temperature Max=85degC, SVHC=NoSVHC(16-Jun-2014), Viewing Angle=170deg, Voltage Vf Typ=2.2V, Wavelength Typ=570nm
J1: library part CMP-2000-05827-1, "Micro-USB B Receptacle, Right Angle, Bottom Mount, Surface Mount, with Solder Tabs, -30 to 85 degC, 5-Pin USB, RoHS, Tape and Reel", Manufacturer=Molex, Package Description="5-Leads USB, Micro B, Body 7.5 x 5 mm, Pitch 0.65 mm", Package Reference=MICRO-B, Package Version="Rev. F, 12/2012", Standard Package=1, Voltage - Max=30V, 3D Model=105017-0001.stp, Catalog Drawings=1050170001, Category=Connectors,Interconnects, Circuits=5, Connector Type=USB-microB, Datasheet URL=http://www.molex.com/elqNow/elqRedir.htm?ref=http://www.molex.com/webdocs/datasheets/pdf/en-us/1050170001_IO_CONNECTORS.pdf, Datasheet Version=03/2016, Family=USB,DVI,HDMIConnectors, Featured Product=Micro-USBConnectorsUSBConnectors, Features=Shielded,SolderRetention, Gender=Receptacle, Ingress Protection=-, Manufacturer URL=http://www.molex.com/, Mating Products=WM17145-ND-CABLEMICROUSBBTOSTDA1.0MWM17147-ND-CABLEMICROUSBBTOSTDA2.0MWM17146-ND-CABLEMICROUSBBTOSTDA1.5M, Mounting Technology=SurfaceMount, Mounting Type=BoardCutout,SurfaceMount,RightAngle, Number of Contacts=5, Online Catalog=Molex-MicroUSB, Other Names=WM1399DKR, Package URL=http://www.molex.com/pdm_docs/sd/1050170001_sd.pdf, Packaging=Digi-Reel®, PCN Assembly/Origin=ResinSupplier21/Oct/2015, RoHS Information=1050170001CertofCompliance, Series=-, Specifications=-
J2 J3 J4 J9: "Connector Header Through Hole 8 position 0.098 (2.50mm)", Package=None, Check_prices=https://www.snapeda.com/parts/B8B-XH-A(LF)(SN)/JST+Sales+America+Inc./view-part/?ref=eda, MF="JST Sales America Inc.", MP=B8B-XH-A(LF)(SN), SnapEDA_Link=https://www.snapeda.com/parts/B8B-XH-A(LF)(SN)/JST+Sales+America+Inc./view-part/?ref=snap
J5 J6 J8: library part B4B-XH-A(LF)(SN), "Connector Header Through Hole 4 position 0.098 (2.50mm)", Package=None, Check_prices=https://www.snapeda.com/parts/B4B-XH-A(LF)(SN)/JST+Sales+America+Inc./view-part/?ref=eda, MF="JST Sales", MP=B4B-XH-A(LF)(SN), SnapEDA_Link=https://www.snapeda.com/parts/B4B-XH-A(LF)(SN)/JST+Sales+America+Inc./view-part/?ref=snap
J7: library part B5B-XH-A(LF)(SN), "Connector Header Through Hole 5 position 0.098 (2.50mm)", Package=None, Check_prices=https://www.snapeda.com/parts/B5B-XH-A(LF)(SN)/JST+Sales+America+Inc./view-part/?ref=eda, MF="JST Sales America Inc.", MP=B5B-XH-A(LF)(SN), SnapEDA_Link=https://www.snapeda.com/parts/B5B-XH-A(LF)(SN)/JST+Sales+America+Inc./view-part/?ref=snap
J10: "Connector Header Through Hole 2 position 0.098 (2.50mm)", Package=None, Check_prices=https://www.snapeda.com/parts/B2B-XH-A(LF)(SN)/JST/view-part/?ref=eda, MF="JST Sales", MP=B2B-XH-A(LF)(SN), SnapEDA_Link=https://www.snapeda.com/parts/B2B-XH-A(LF)(SN)/JST/view-part/?ref=snap
J11 J13: library part MTLW-102-XX-X-D-XXX, "Connector Header Through Hole 4 position 0.100 (2.54mm)", Package=None, Check_prices=https://www.snapeda.com/parts/MTLW-102-05-G-D-180/Samtec/view-part/?ref=eda, MF=Samtec, MP=MTLW-102-05-G-D-180, SnapEDA_Link=https://www.snapeda.com/parts/MTLW-102-05-G-D-180/Samtec/view-part/?ref=snap
J12: library part MTLW-104-06-G-D-160, Package=None, Availability=Unavailable, MP=MTLW-104-06-G-D-160, Price=None
L1: library part CMP-02424-000271-1, "Commercial Inductors, High Saturation Series 4.7uH 4.5A 63mΩ 20%", Case/Package=2525, Current Rating=4.5A, DC Resistance (DCR)=63mR, Inductance=4.7uH, Inductance Tolerance=20%, Max DC Current=10A, Max Operating Temperature=125°C, Min Operating Temperature=-55°C, Package Quantity=2000, Self Resonant Frequency=5MHz, Test Frequency=100kHz, Core Material=Metal, Depth=6.72mm, Height=2.4mm, Height - Seated (Max)=0.094inch, Lead Free="Lead Free", Length=6.86mm, Military Standard=Not, Mount="Surface Mount", Number of Pins=2525, Packaging="Tape and Reel", Radiation Hardening=No, RMS Current (Irms)=4.5A, Saturation Current=10A, Shielding=Shielded, Termination=SMD/SMT, Tolerance=20%, Width=6.47mm